# Altium PCB captivate_pgmr.PcbDoc (part 1 of 2)
Units mil, origin at the board's own origin, x right, y up, seen from the top; angles counter-clockwise.
Board outline 2200 x 2200 mil, 4 copper layers (Top Layer, Signal Layer 1, Signal Layer 2, Bottom Layer), stack 61.6 mil thick; 159 components, 109 nets, 528 pads, 147 vias.
Unrouted connection lines stored in the file: 5.
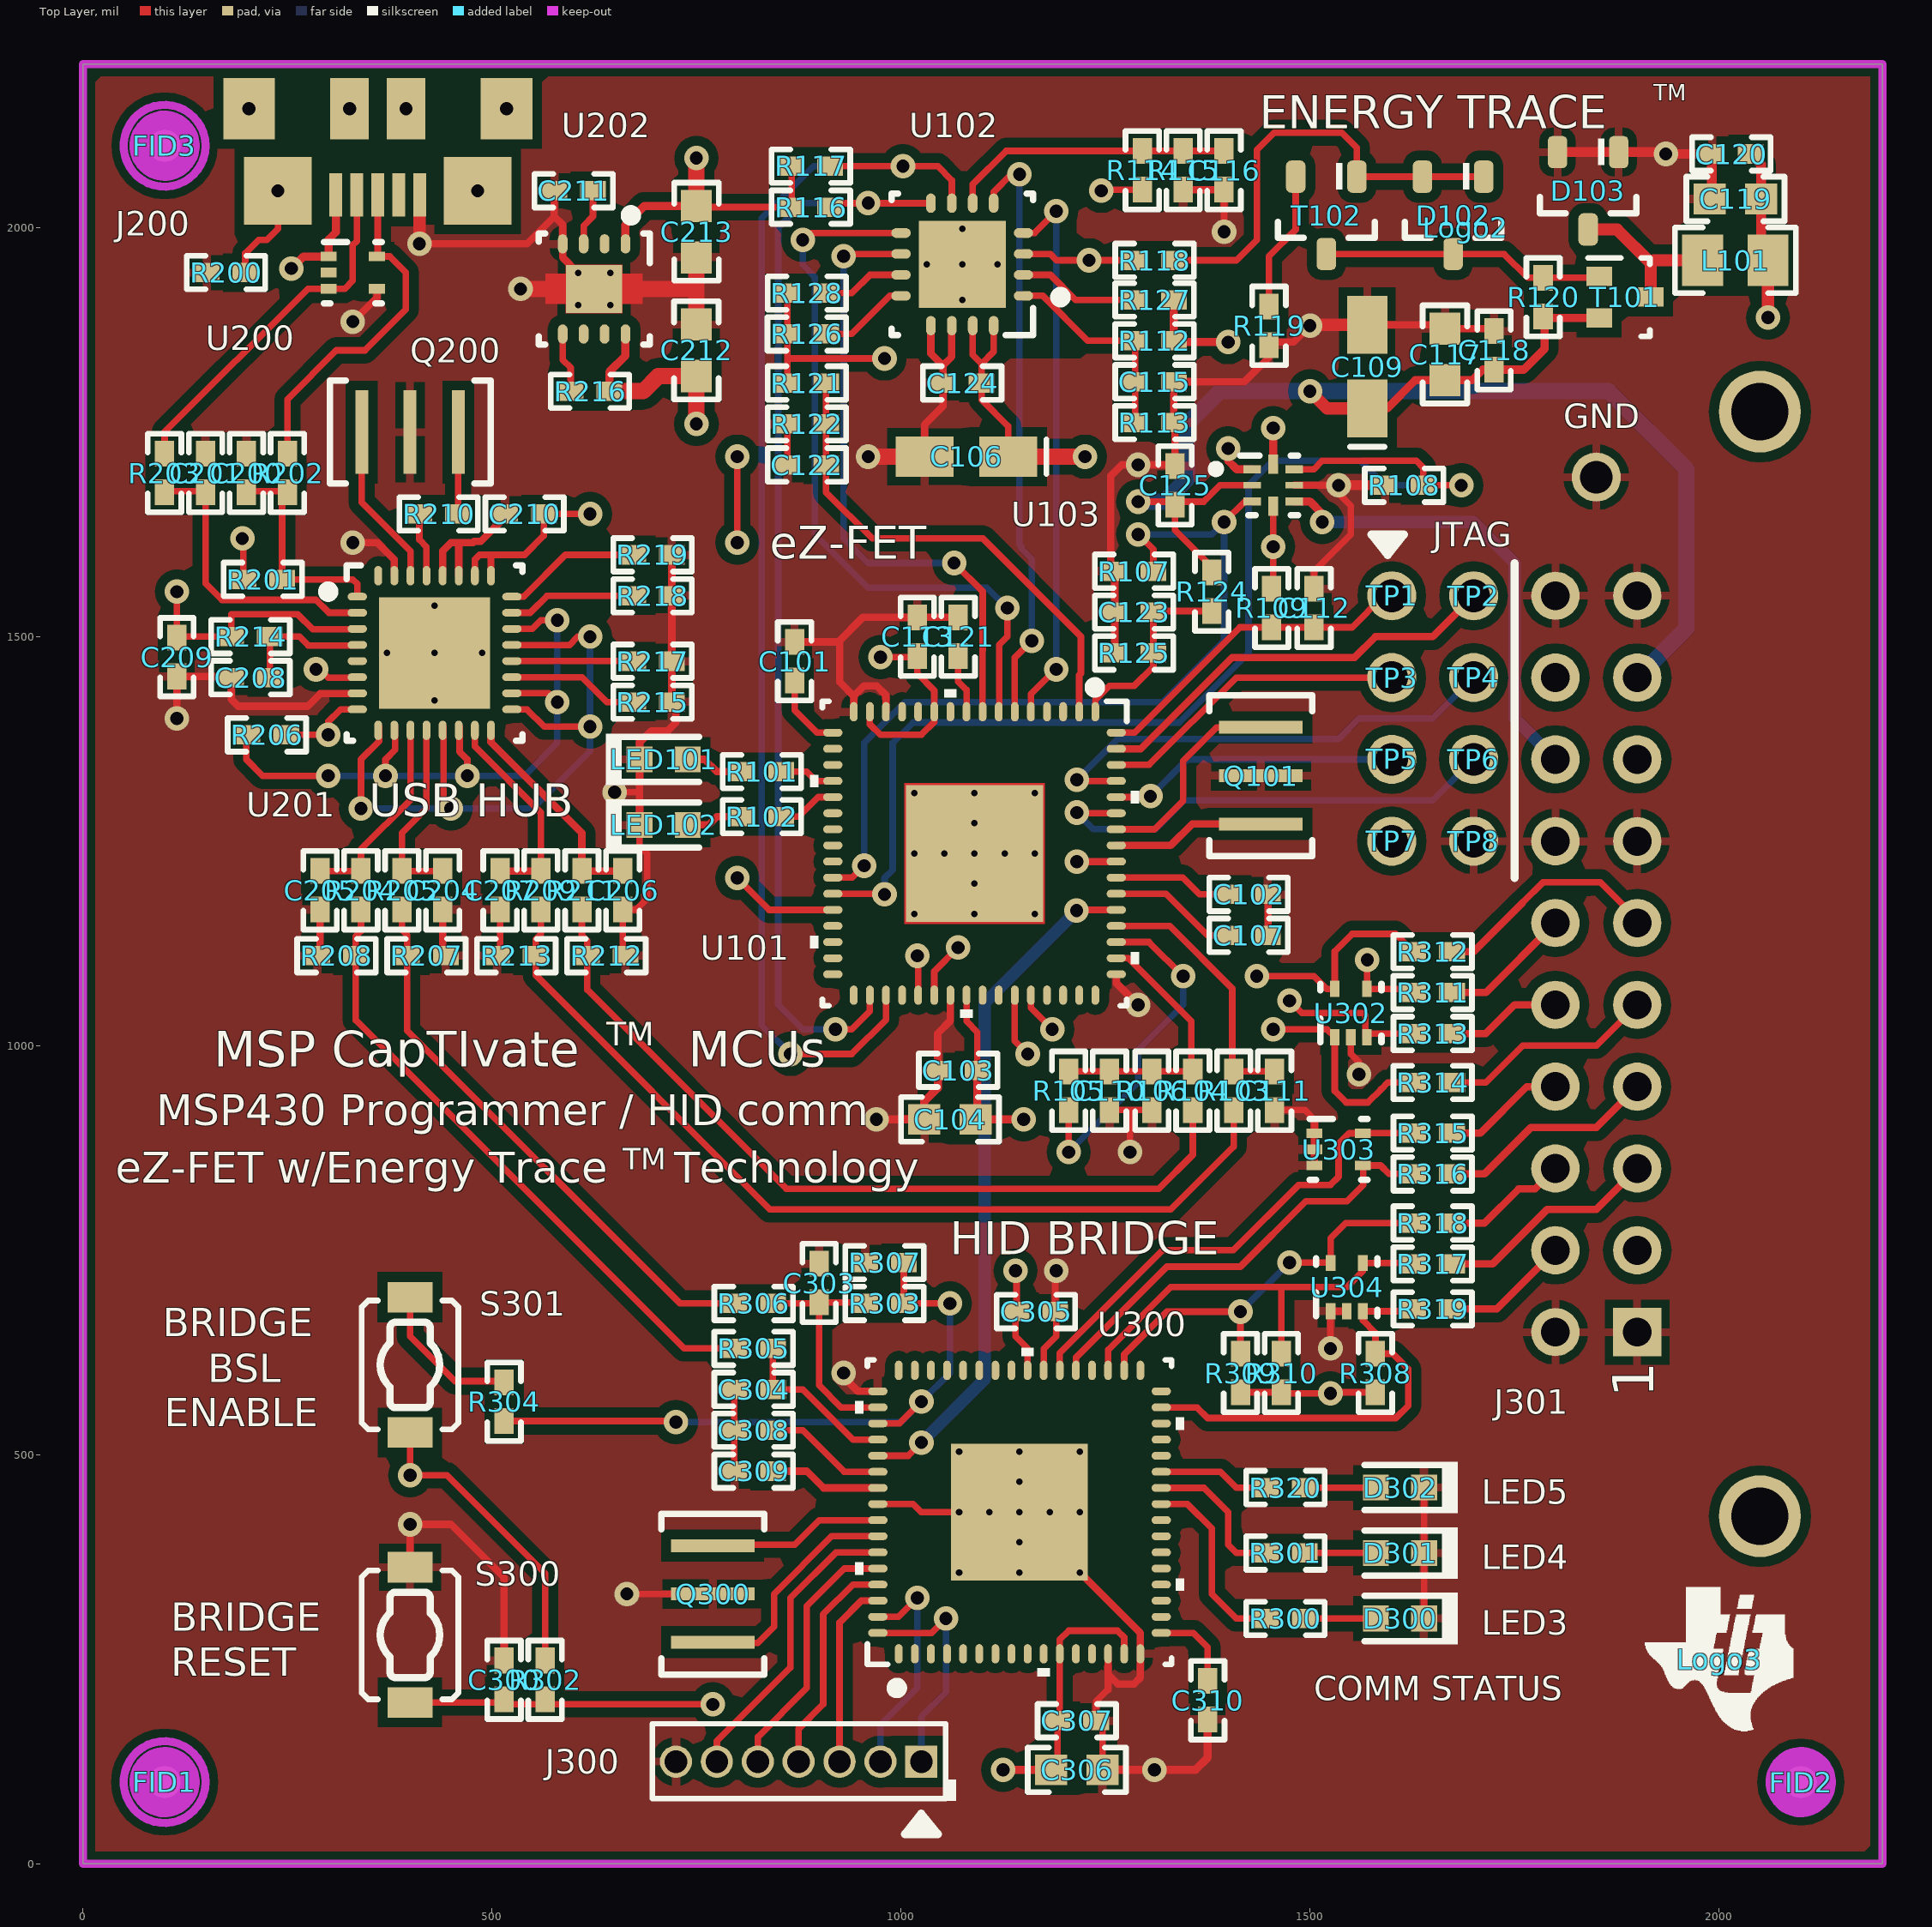
[diagram p0: Top Layer view]
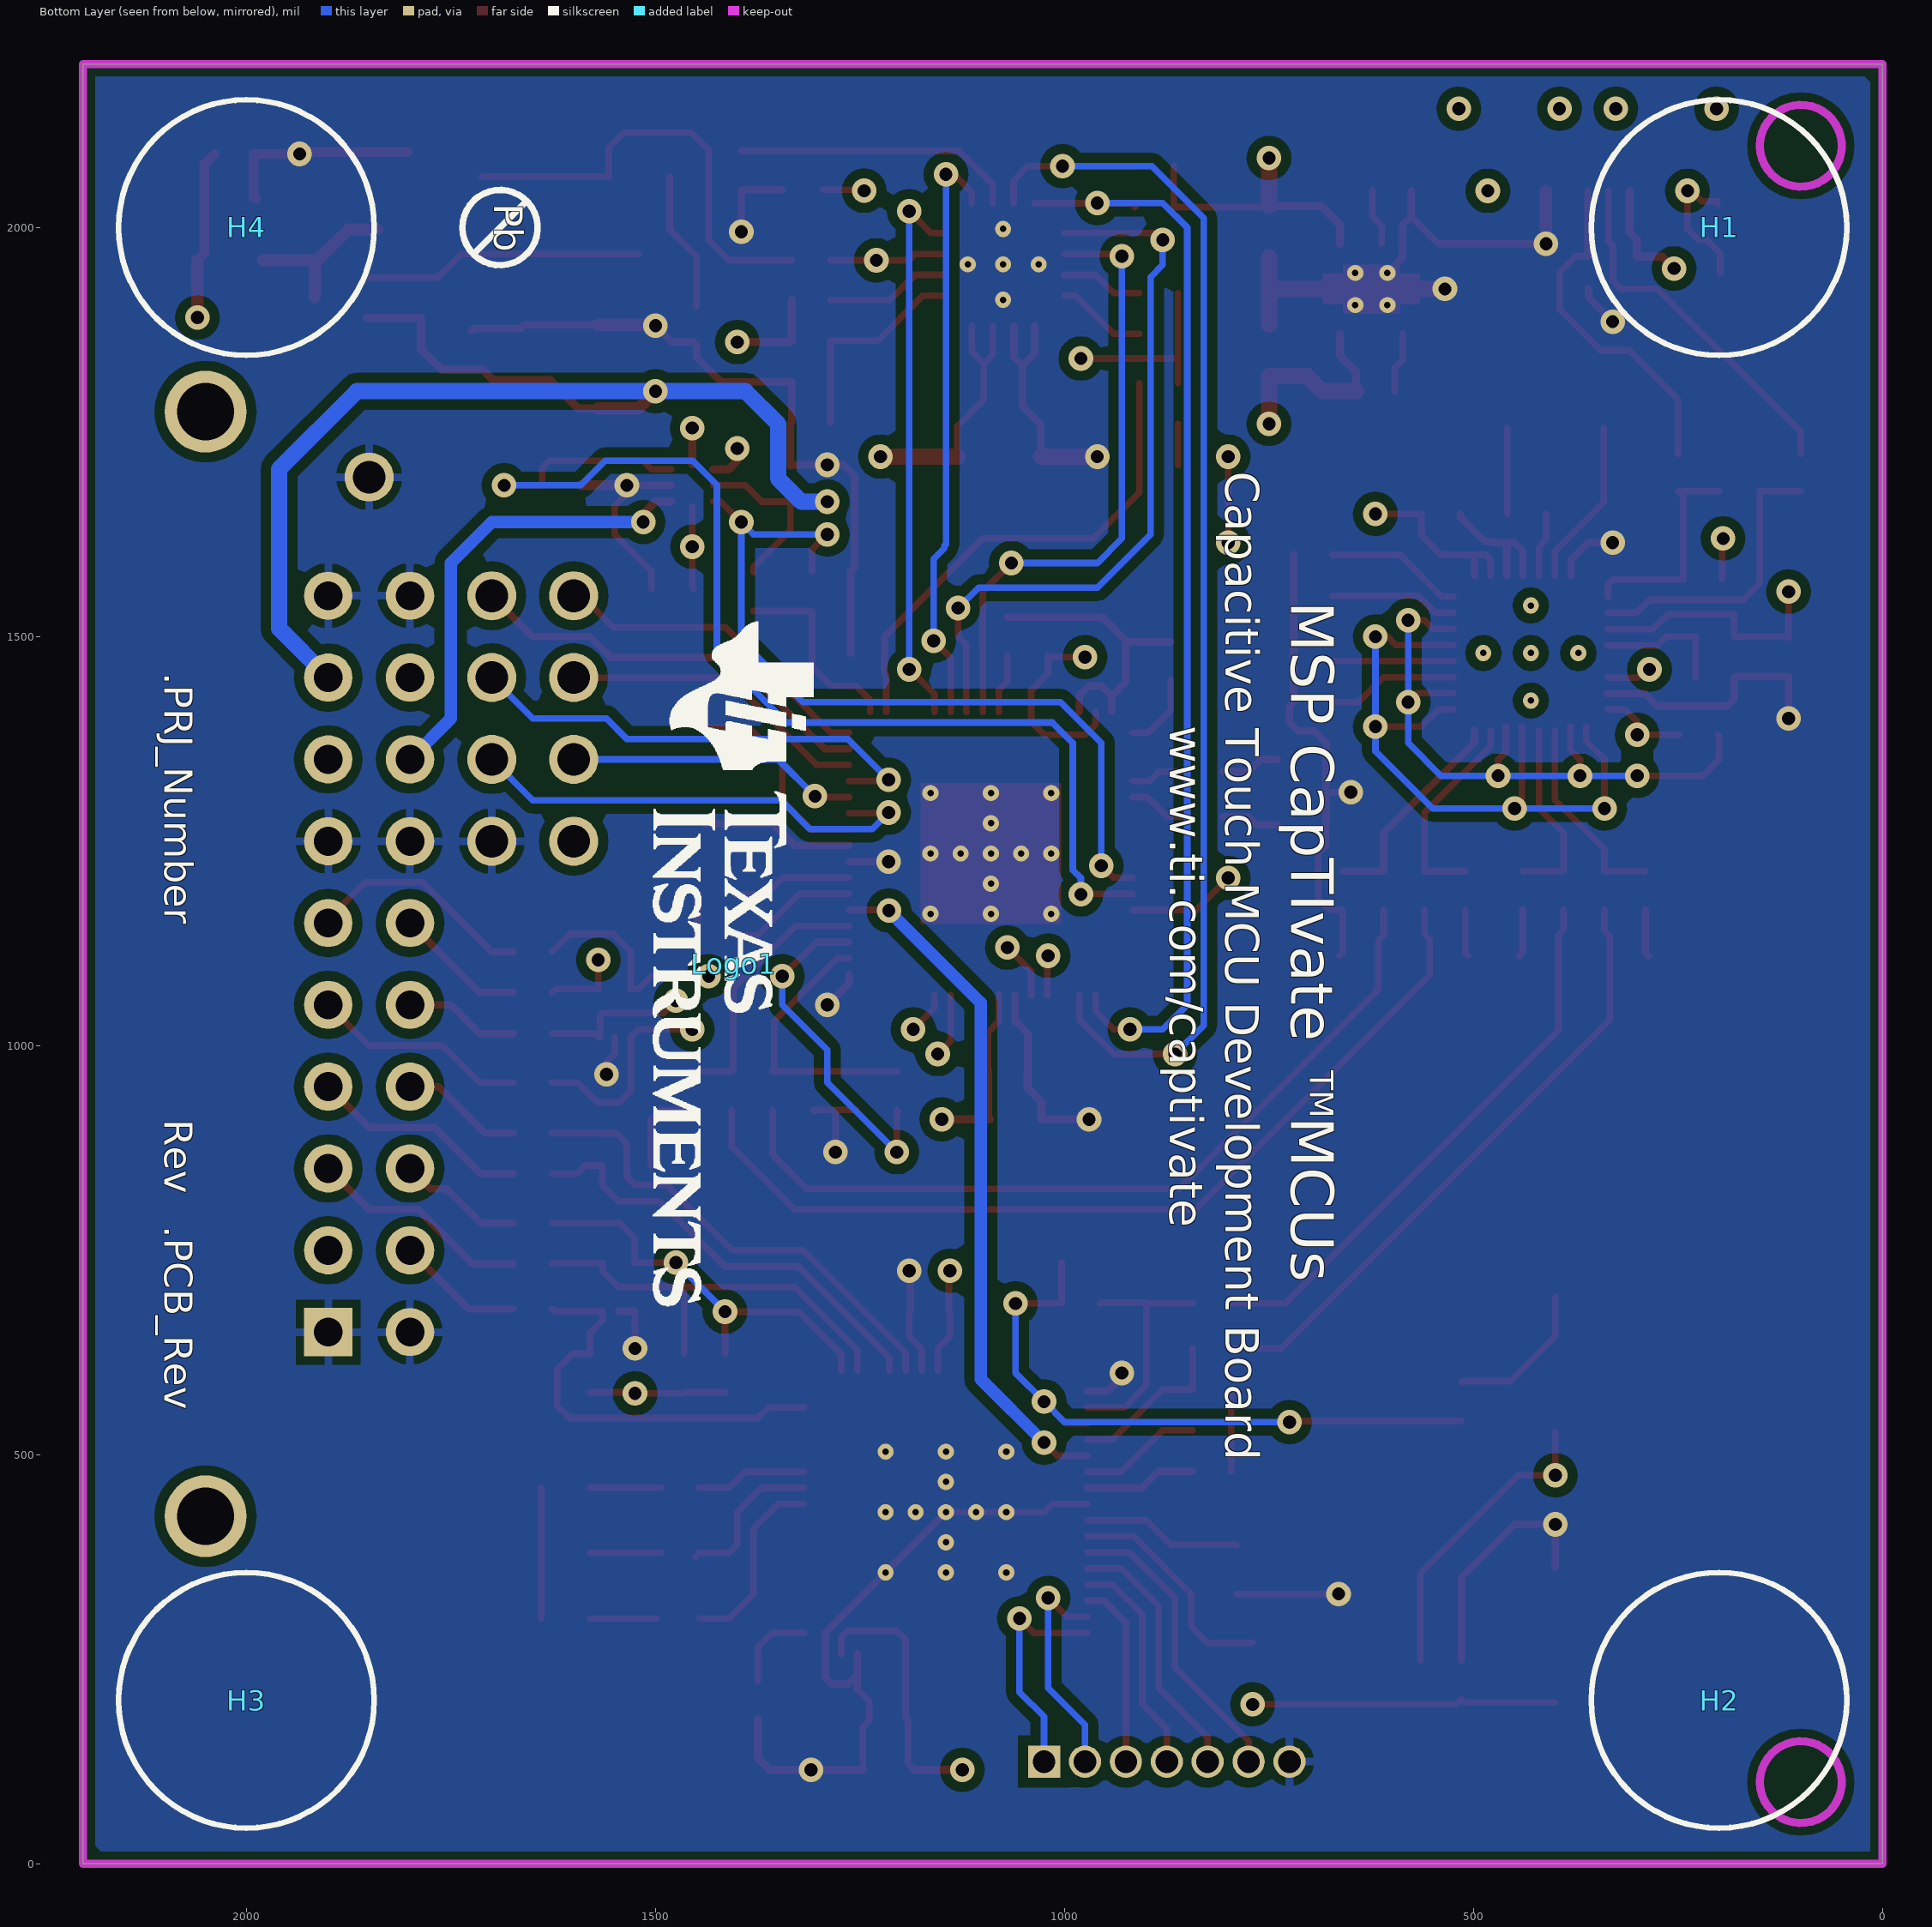
[diagram p1: Bottom Layer view, seen from below]
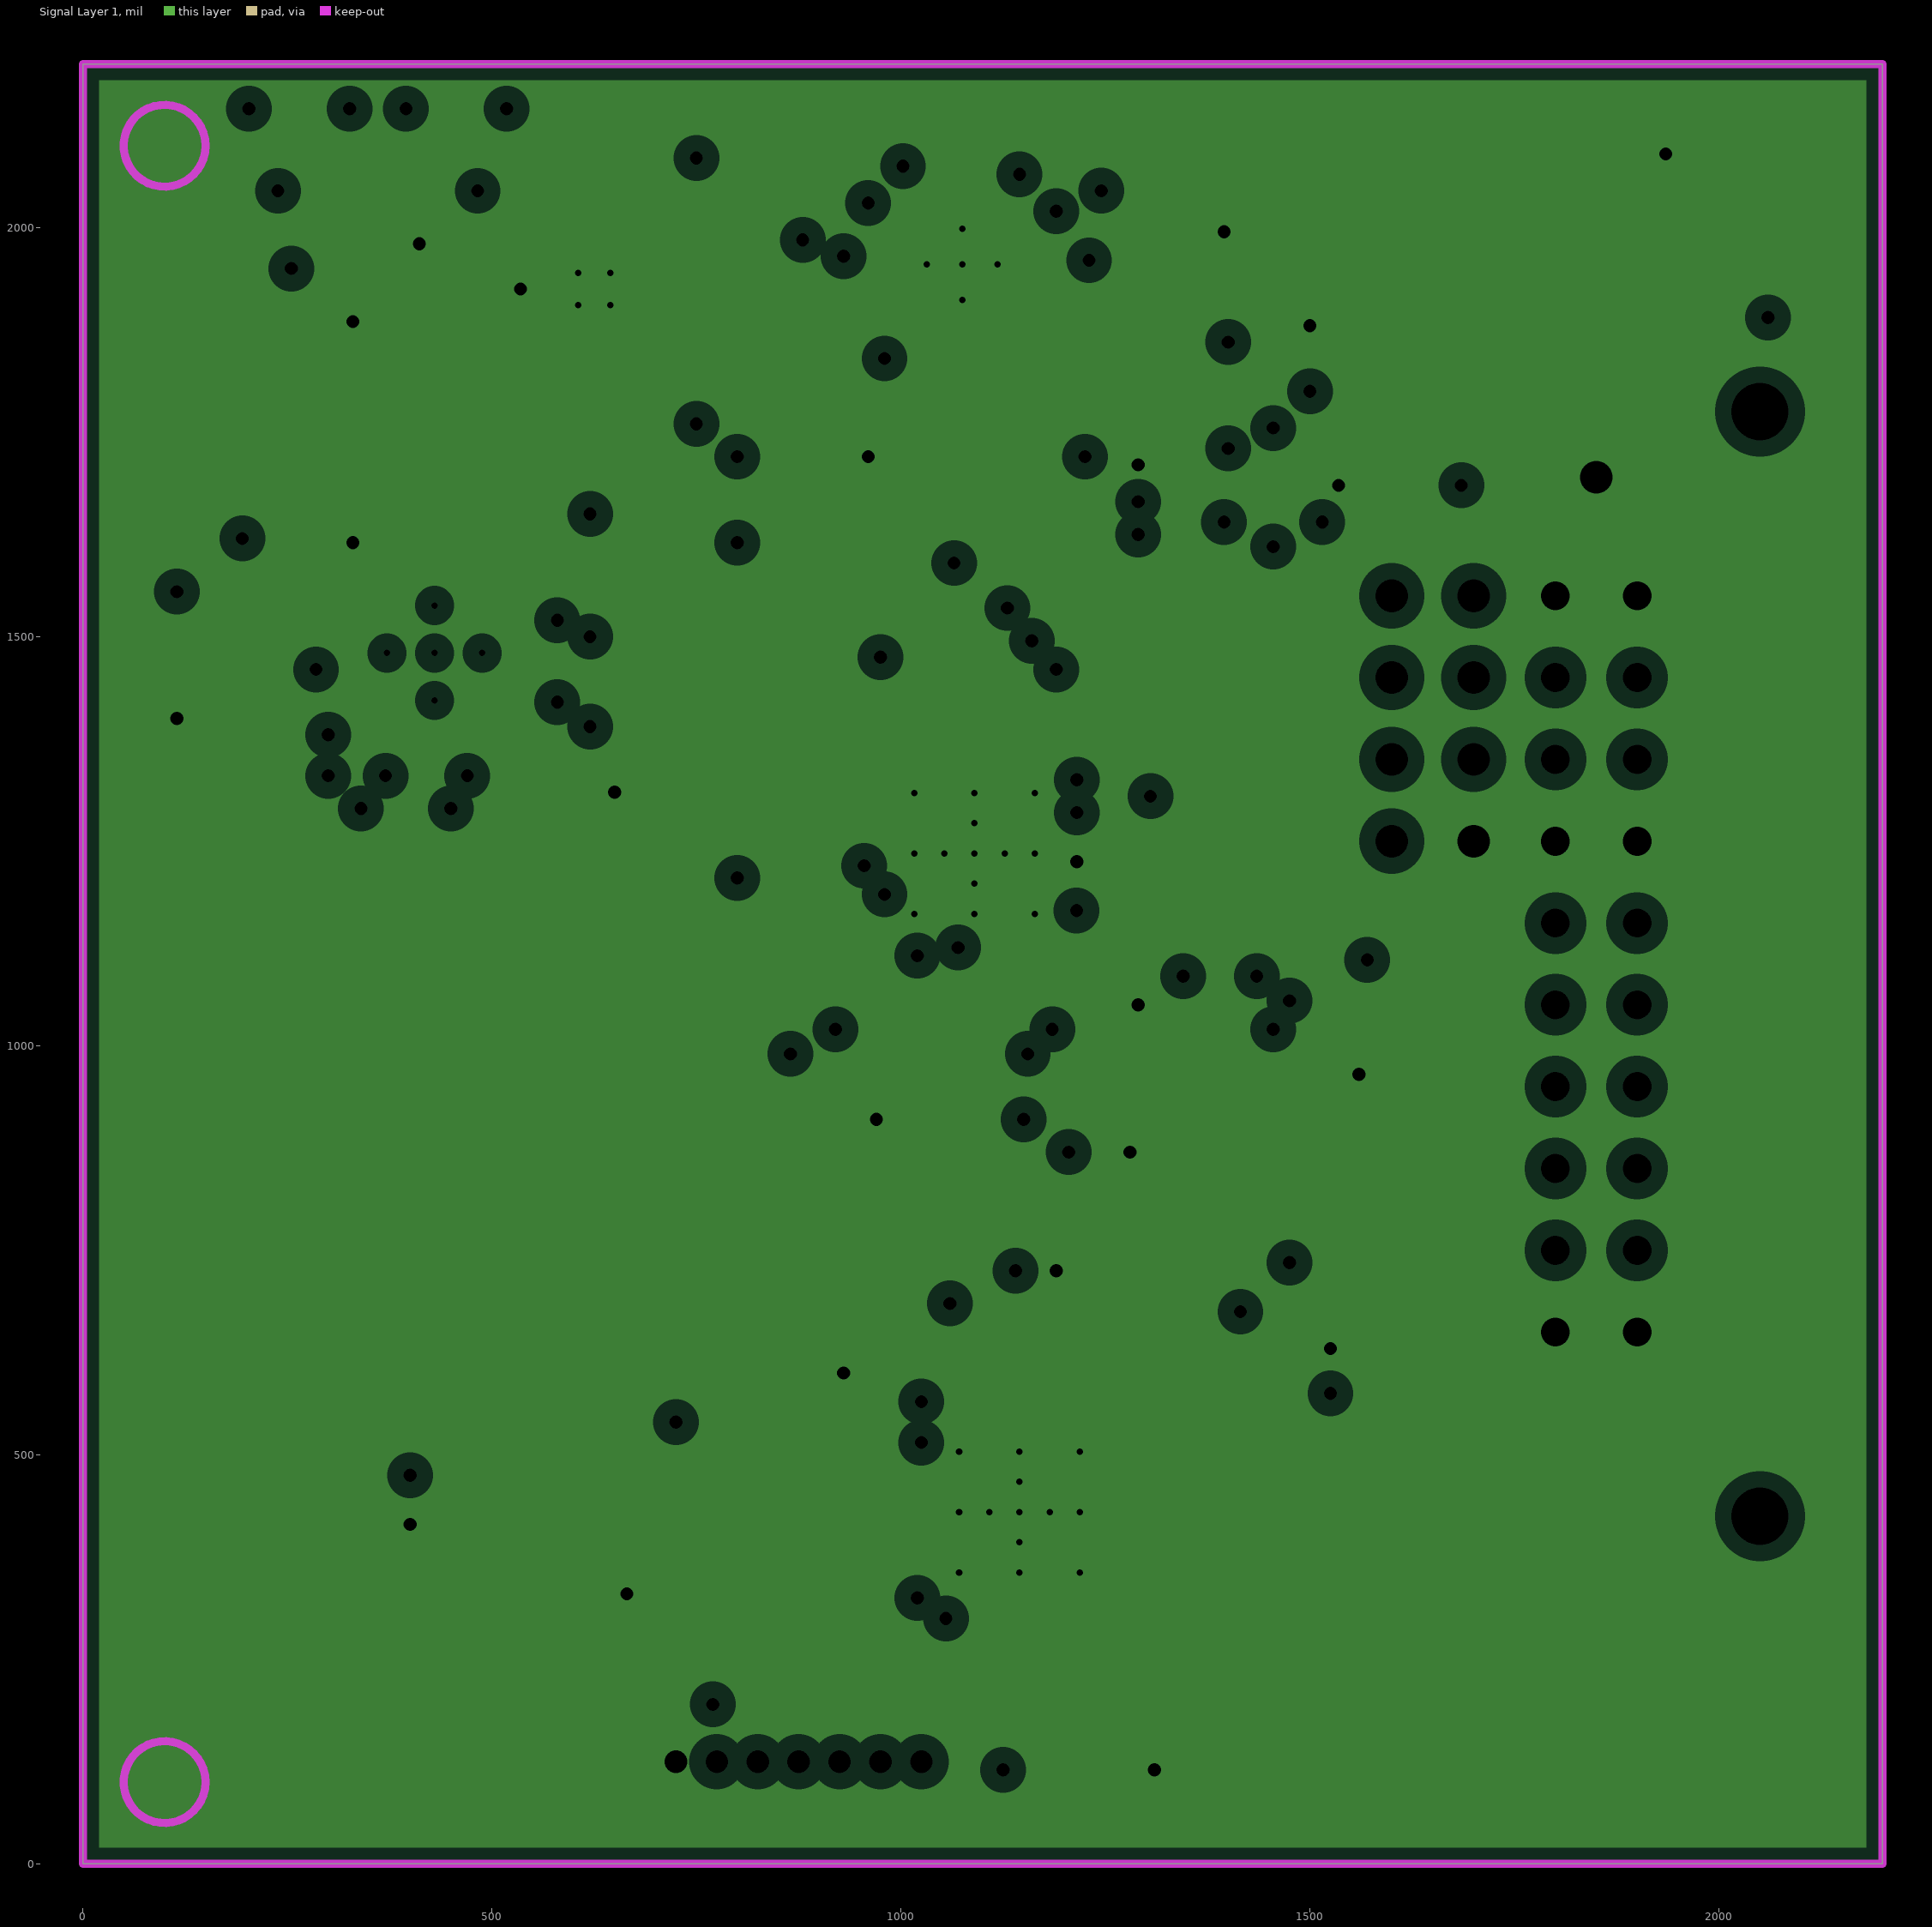
[diagram p2: Signal Layer 1, clearances drawn from the general rule]
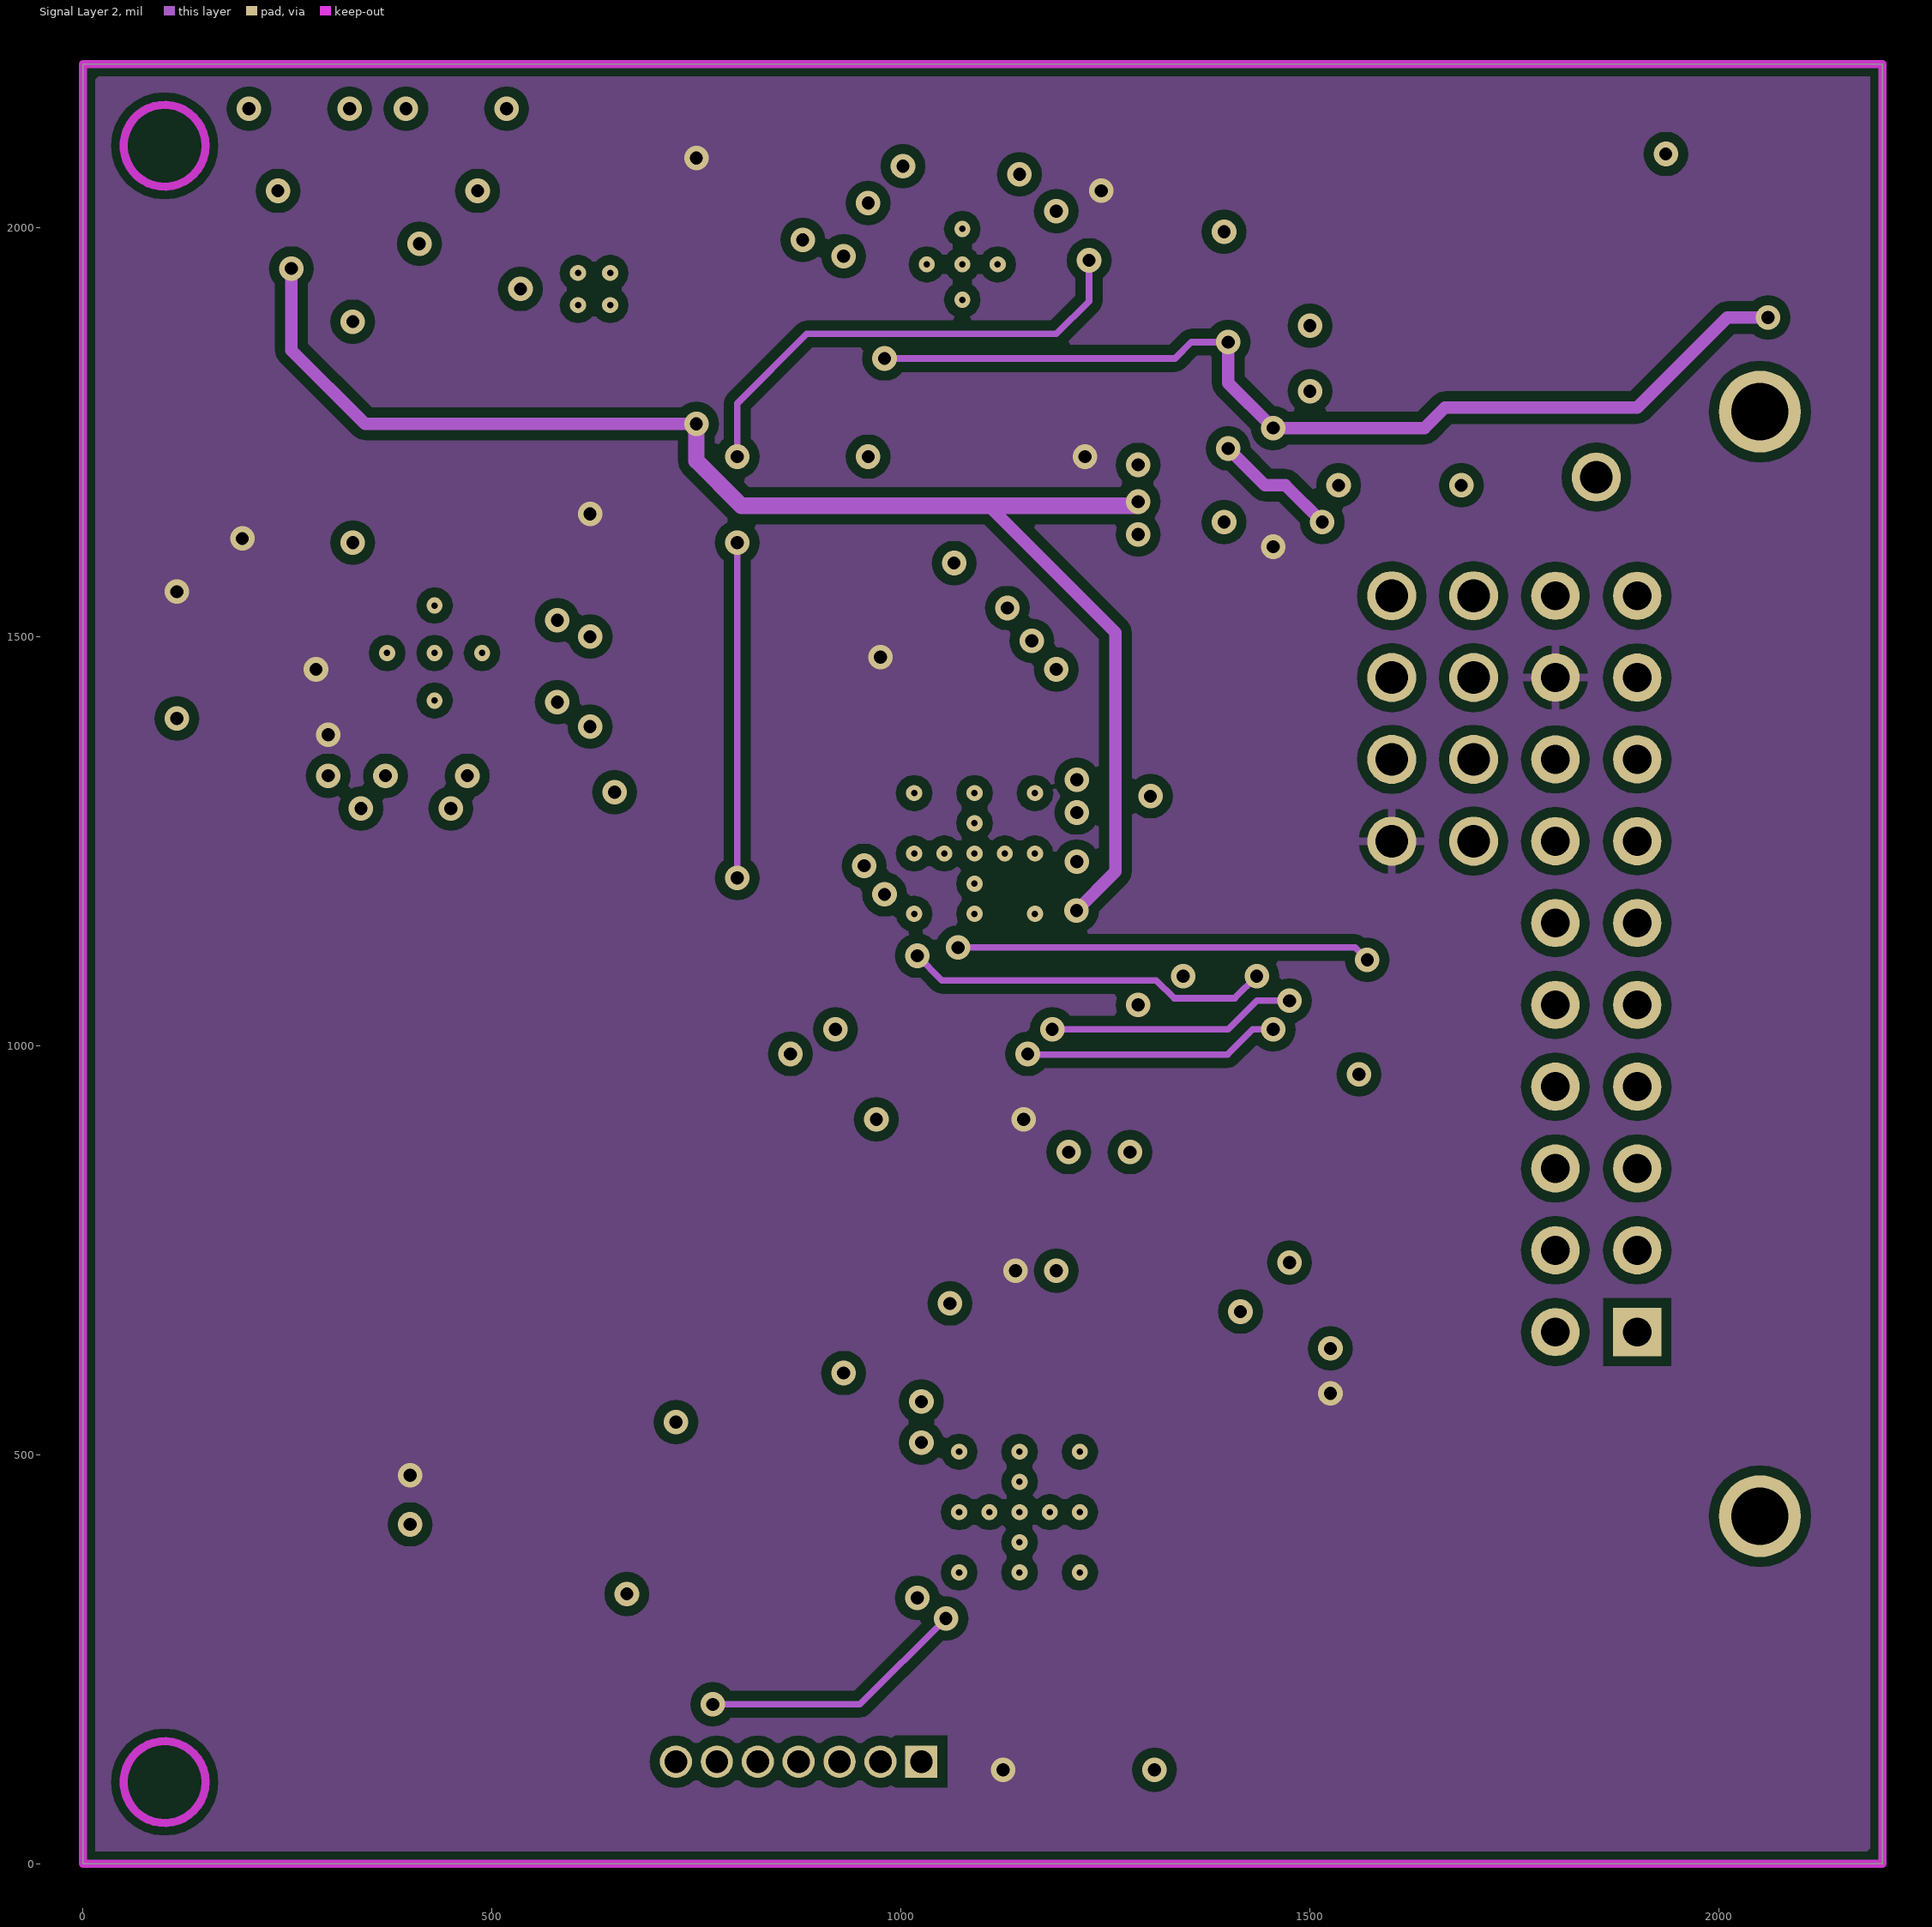
[diagram p3: Signal Layer 2]

## Layer stack, top to bottom
Top Solder: solder mask 0.4, Solder Resist, Dk 3.5
Top Layer: signal copper 1.4
Dielectric1: core 8, Dk 4.2
Signal Layer 1: plane copper 1.4, net GND
Dielectric 2: prepreg 40, FR-4, Dk 4.2
Signal Layer 2: signal copper 1.4
Dielectric 3: core 8, Dk 4.2
Bottom Layer: signal copper 1.4
Bottom Solder: solder mask 0.4, Solder Resist, Dk 3.5

## Board outline
0,0 0,2200 2200,2200 2200,0

## Design rules (kind name [scope] priority, off if disabled: settings)
AcuteAngle [All] p1: minimum=4.50000000000000E+0001 checktracksonly=FALSE
AssemblyTestPointUsage [All] p1: valid=2
Clearance Clearance_Keepouts [((IsTrack Or IsArc) And Not InPoly) And IsFree and IsKeepOut vs ((IsTrack Or IsArc) And Not InPoly) And IsFree and IsKeepOut] p1: gap=0
Clearance Clearance_BoardEdge_MountingHoles [OnCopper and InComponentClass('Mounting Holes') vs IsKeepOut] p2: gap=40
Clearance Clearance_BoardEdge_USB_connector [(InPadClass('All Pads') AND InComponent('J200')) vs IsKeepOut] p3: gap=10
Clearance Clearance_BoardEdge_USB_connector_vias [(IsVia AND InNet('USB_SHIELD')) vs IsKeepOut] p4: gap=20
Clearance Clearance_BoardEdge_Poly [OnCopper and InPoly vs IsKeepOut] p5: gap=10
Clearance Clearance_BoardEdge [OnCopper and Not InComponentClass('Logo') and not InComponentClass('FiducialMark') and not InRegion(1000,500,4000,800) and Not IsKeepout vs IsKeepOut] p6: gap=60
Clearance Clearance_Poly [InPolygon] p7: gap=12
Clearance [All] p8: gap=7.87
ComponentClearance ComponentClearance_MountingHoles_FiducialMarks [InComponentClass('Mounting Holes') vs InComponentClass('FiducialMark')] p1: gap=50 collisioncheckmode=3 verticalgap=10 showdistances=FALSE
ComponentClearance ComponentClearance_Shunt [InComponentClass('Header') vs InComponentClass('Shunt')] p2: gap=0 collisioncheckmode=3 verticalgap=0 showdistances=FALSE
ComponentClearance ComponentClearance_Logo [InComponentClass('Logo')] p3: gap=0 collisioncheckmode=3 verticalgap=10 showdistances=FALSE
ComponentClearance ComponentClearance_ScrewToNut [(HasFootprint('NY PMS 440 0025 PH')) vs (HasFootprint('Keystone_1902C'))] p4: gap=5 collisioncheckmode=3 verticalgap=10 showdistances=FALSE
ComponentClearance ComponentClearance_MountingHoles [InComponentClass('Mounting Holes')] p5: gap=250 collisioncheckmode=3 verticalgap=100000 showdistances=FALSE
ComponentClearance ComponentClearance_SmallPassives [HasFootprint('0201*') or HasFootprint('0402*') or HasFootprint('0508') or HasFootprint('0603*') or HasFootprint('0612') or HasFootprint('0805*') or HasFootprint('0815*') or HasFootprint('0830*') or HasFootprint('1206*') or HasFootprint('1210*') or HasFootprint('1808*') or HasFootprint('1812*') or HasFootprint('1825*') or HasFootprint('2010*') or HasFootprint('2220*') or HasFootprint('2225*') or HasFootprint('2512*') or HasFootprint('2728*') or HasFootprint('3518*') vs HasFootprint('0201*') or HasFootprint('0402*') or HasFootprint('0508') or HasFootprint('0603*') or HasFootprint('0612') or HasFootprint('0805*') or HasFootprint('0815*') or HasFootprint('0830*') or HasFootprint('1206*') or HasFootprint('1210*') or HasFootprint('1808*') or HasFootprint('1812*') or HasFootprint('1825*') or HasFootprint('2010*') or HasFootprint('2220*') or HasFootprint('2225*') or HasFootprint('2512*') or HasFootprint('2728*') or HasFootprint('3518*')] p6: gap=20 collisioncheckmode=3 verticalgap=10 showdistances=FALSE
ComponentClearance ComponentClearance_TEST_POINT [InComponent('TP1') OR  InComponent('TP2') OR InComponent('TP3') OR  InComponent('TP4') OR InComponent('TP5') OR  InComponent('TP6') OR InComponent('TP7') OR  InComponent('TP8') vs IsThruComponent] p7: gap=10 collisioncheckmode=3 verticalgap=10 showdistances=FALSE
ComponentClearance ComponentClearance_THtoSMT_J100 [InComponent('J100') vs IsSMTComponent] p8: gap=20 collisioncheckmode=3 verticalgap=30 showdistances=FALSE
ComponentClearance ComponentClearance_THtoSMT [IsThruComponent vs IsSMTComponent] p9: gap=40 collisioncheckmode=3 verticalgap=30 showdistances=FALSE
ComponentClearance ComponentClearance_THtoTH [IsThruComponent vs IsThruComponent] p10: gap=75 collisioncheckmode=3 verticalgap=30 showdistances=FALSE
ComponentClearance [All] p11: gap=40 collisioncheckmode=3 verticalgap=10 showdistances=FALSE
DiffPairsRouting [All] p1: maxlimit=100 minlimit=10 mostfreqgap=10 toplayer_minwidth=15 toplayer_maxwidth=15 toplayer_prefwidth=15 midlayer1_minwidth=15 midlayer1_maxwidth=15 midlayer1_prefwidth=15 bottomlayer_minwidth=15 bottomlayer_maxwidth=15 bottomlayer_prefwidth=15 maxuncoupledlength=1000
FabricationTestPointUsage TestPointUsage [All] p1: valid=2 allowmultiple=FALSE
FabricationTestpoint Testpoint [All] p1: side=3 testpointundercomponent=TRUE minsize=40 maxsize=100 preferedsize=60 minholesize=0 maxholesize=40 preferedholesize=32 testpointgrid=1 allowsidetop=TRUE allowsidebottom=TRUE usegrid=TRUE gridtolerance=0.01
FanoutControl Fanout_LCC [IsLCC] p1: bgadir=Out bgaviamode=Centered fanoutstyle=Auto fanoutdirection=Alternating viagrid=1 // Fanout_LCC (Default Rule)
FanoutControl Fanout_BGA [IsBGA] p2: bgadir=Out bgaviamode=Centered fanoutstyle=Auto fanoutdirection=Alternating viagrid=1 // Fanout_BGA (Default Rule)
FanoutControl Fanout_Default [All] p4: bgadir=Out bgaviamode=Centered fanoutstyle=Auto fanoutdirection=Alternating viagrid=1 // Fanout_Default (Default Rule)
FanoutControl Fanout_Small [(CompPinCount < 5)] p5: bgadir=Out bgaviamode=Centered fanoutstyle=Auto fanoutdirection=OutThenIn viagrid=1 // Fanout_Small (Default Rule)
HoleSize [All] p1: absolutevalues=TRUE maxlimit=251 minlimit=7.87 maxpercent=80.000 minpercent=20.000
MinimumAnnularRing MinimumAnnularRing_ThermalPadVias [IsVia and InAnyComponent] p1: minimumring=5.91
MinimumAnnularRing MinimumAnnularRing_50mil_connectors [IsPad AND (InComponent('J100') OR InComponent('J300'))] p2: minimumring=5.9
MinimumAnnularRing [All] p3: minimumring=7
MinimumSolderMaskSliver MinimumSolderMaskSliver_Logo [InComponentClass('Logo') vs InComponentClass('Logo')] p1: minsoldermaskwidth=0.7
MinimumSolderMaskSliver [All] p2: minsoldermaskwidth=3.9
PlaneClearance [All] p1: clearance=20
PlaneConnect [All] p1: planeconnectstyle=Direct reliefexpansion=10 reliefentries=4 reliefconductorwidth=10 reliefairgap=10
PolygonConnect PolygonConnect_vias_GND [InNet('GND') AND ISVia] p1: connectstyle=Direct reliefconductorwidth=10 reliefentries=4 polygonreliefangle="90 Angle" airgapwidth=10
PolygonConnect PolygonConnect_vias_VCC_LDO [InNet('VCC_LDO') AND ISVia] p2: connectstyle=Direct reliefconductorwidth=10 reliefentries=4 polygonreliefangle="90 Angle" airgapwidth=10
PolygonConnect [All] p3: connectstyle=Relief reliefconductorwidth=10 reliefentries=4 polygonreliefangle="90 Angle" airgapwidth=10
RoutingVias ThermalPadVias [IsVia and InAnyComponent] p1: holewidth=7.87 width=19.68 viastyle="Through Hole" minholewidth=7.87 minwidth=19.68 maxholewidth=12.99 maxwidth=23.62
RoutingVias [All] p2: holewidth=16 width=34 viastyle="Through Hole" minholewidth=7.87 minwidth=26 maxholewidth=40 maxwidth=65
SilkToBoardRegionClearance [Not ((IsComment or IsDesignator) And (Hide <> 'False')) and not InRegion(1000,500,4000,800)] p1:
SilkToSilkClearance SilkToSilkClearance_Pb-FreeLogo [(HasFootprint('Pb-Free_Overlay_Medium') OR HasFootprint('Pb-Free_Overlay_Small')) vs (HasFootprint('Pb-Free_Overlay_Medium') OR HasFootprint('Pb-Free_Overlay_Small'))] p1: silktosilkclearance=0
SilkToSilkClearance [All] p2: silktosilkclearance=5
SilkToSolderMaskClearance "Silk to Solder Mask Opening" [All] p1: minsilkscreentomaskgap=1 clearancetoexposedcopper=FALSE
SolderMaskExpansion [All] p1: expansion=1.97
UnpouredPolygon [All] p1: allowunpoured=FALSE
Width [All] p1: maxlimit=100 minlimit=6 preferedwidth=10 checkconnectedcopper=TRUE
13 further rules are at their usual default settings.

## Classes and differential pairs
component class FiducialMark: FID1 FID2 FID3
component class Logo: Logo1 Logo3
component class U_hardware: FID1 FID2 FID3 H1 H2 H3 H4 Logo1 Logo2 Logo3 ZZ2 ZZ3 ZZ4
component class AssemblyNote: ZZ2 ZZ3 ZZ4
component class Header: J300
component class U_bridge: C300 C303 C304 C305 C306 C307 C308 C309 C310 D300 D301 D302 GND J300 J301 Q300 R300 R301 R302 R303 R304 R305 R306 R307 R308 R309 R310 R311 R312 R313 R314 R315 R316 R317 R318 R319 R320 S300 S301 U300 U302 U303 U304
component class U_ezfet: C101 C102 C103 C104 C106 C107 C109 C110 C111 C112 C113 C115 C116 C117 C118 C119 C120 C121 C122 C123 C124 C125 D102 D103 L101 LED101 LED102 Q101 R101 R102 R103 R104 R105 R106 R107 R108 R109 R112 R113 R114 R115 R116 R117 R118 R119 R120 R121 R122 R124 R125 R126 R127 R128 T101 T102 TP1 TP2 TP3 TP4 TP5 TP6 TP7 TP8 U100 U101 U102 U103
component class U_usbhub: C200 C201 C204 C205 C206 C207 C208 C209 C210 C211 C212 C213 J200 Q200 R200 R201 R202 R203 R204 R205 R206 R207 R208 R209 R210 R211 R212 R213 R214 R215 R216 R217 R218 R219 U200 U201 U202

## Components (designator, comment, footprint, x,y, rotation, side; value= is the part's Value field where it differs from the comment)
C101 "GRM155R61A474KE15D" 0402 870,1470 r90 top
C102 "GRM155R61A224KE19D" 0402 1425,1185 r0 top
C103 "C1005X5R1A104K" 0402 1070,970 r180 top
C104 "CGB3B1X5R1A475K055AC" 0603 1060,910 r180 top
C106 "293D475X9010A2TE3" 3216-18 1080,1720 r180 top
C107 "GRM155R61A224KE19D" 0402 1425,1135 r0 top
C109 "293D475X9010A2TE3" 3216-18 1570,1830 r90 top
C110 "500R07S100JV4T" 0402 1255,945 r270 top
C111 "500R07S100JV4T" 0402 1456.79,945 r270 top
C112 "C1005X7R1H102K" 0402 1505,1535 r90 top
C113 "C1005X5R1A104K" 0402 1020,1500 r90 top
C115 "GRM1555C1H330JA01D" 0402 1310,1811.65 r0 top
C116 "GRM1555C1H330JA01D" 0402 1395,2070 r270 top
C117 "0603ZD475KAT2A" 0603 1665,1845 r90 top
C118 "C1005X5R1A104K" 0402 1725,1850 r90 top
C119 "0603ZD475KAT2A" 0603 2020,2035 r180 top
C120 "C1005X5R1A104K" 0402 2015,2090 r180 top
C121 "C1005X5R1A104K" 0402 1070,1500 r90 top
C122 "GRM1555C1H330JA01D" 0402 885,1710 r180 top
C123 "GRM1555C1H330JA01D" 0402 1285,1530 r180 top
C124 "C1005X5R1A104K" 0402 1075,1810 r180 top
C125 "C1005X5R1A104K" 0402 1335,1685 r90 top
C200 "GRM1555C1H220JA01D" 0402 200,1700 r90 top
C201 "GRM1555C1H220JA01D" 0402 150,1700 r90 top
C204 "GRM1555C1H100JA01D" 0402 440,1190 r270 top
C205 "GRM1555C1H100JA01D" 0402 290,1190 r270 top
C206 "GRM1555C1H100JA01D" 0402 660,1190 r270 top
C207 "GRM1555C1H100JA01D" 0402 510,1190 r270 top
C208 "GRM155R61C104KA88D" 0402 205,1450 r180 top
C209 "GRM155R61C104KA88D" 0402 115,1475 r270 top
C210 "GRM155R61C104KA88D" 0402 540,1650 r180 top
C211 "GRM155R61C103KA01D" 0402 600,2045 r180 top
C212 "C0603C105K8PACTU" 0603 750,1850 r90 top
C213 "C0603C225K8PACTU" 0603 750,1995 r270 top
C300 "C1005X7R1H102K" 0402 515,225 r90 top
C303 "GRM1555C1H100JA01D" 0402 900,710 r90 top
C304 "GRM1555C1H100JA01D" 0402 820,580 r180 top
C305 "GRM155R61C104KA88D" 0402 1165,675 r0 top
C306 "CGB3B1X5R1A475K055AC" 0603 1215,115 r0 top
C307 "GRM155R61C104KA88D" 0402 1215,175 r0 top
C308 "GRM155R61A224KE19D" 0402 820,530 r180 top
C309 "GRM155R61A224KE19D" 0402 820,480 r180 top
C310 "GRM155R61A474KE15D" 0402 1375,200 r270 top
D102 "BAS40-05-7-F" SOT-23 1675,2015 r270 top
D103 "BAS40-05-7-F" SOT-23 1840,2045 r270 top
D300 "LTST-C190CKT" LED_LTST-C190_Red 1610,300 r0 top
D301 "LTST-C190GKT" LED_LTST-C190 1610,380 r0 top
D302 "LTST-C190GKT" LED_LTST-C190 1610,460 r0 top
FID1 "Fiducial" Fiducial10-20 100,100 r90 top
FID2 "Fiducial" Fiducial10-20 2100,100 r90 top
FID3 "Fiducial" Fiducial10-20 100,2100 r90 top
GND "TESTPOINT" TP_VIA_060RND040 1850,1695 r0 top
H1 "SJ61A1" Bumpon_SJ61A1 200,2000 r180 bottom
H2 "SJ61A1" Bumpon_SJ61A1 200,200 r180 bottom
H3 "SJ61A1" Bumpon_SJ61A1 2000,200 r180 bottom
H4 "SJ61A1" Bumpon_SJ61A1 2000,2000 r180 bottom
J200 "ZX62R-B-5P" CONN_USB_micro_ZX62R-B-5PA 360.55,2040 r180 top
J300 "GRPB071VWVN-RC" Sullins_GRPB071VWVN-RC 900,125 r180 top locked
J301 "Header 10X2RA" HDR2X10RA 1900,650 r90 top locked
L101 "CIG21L2R2MNE" 0805_HV 2020,1960 r0 top
LED101 "LTST-C190CKT" LED_LTST-C190_Red 710,1350 r180 top
LED102 "LTST-C190GKT" LED_LTST-C190 710,1270 r180 top
Logo1 "Texas Instruments" TI_Stacked_Overlay_Small 1405,1100 r270 bottom
Logo2 "Pb-Free Symbol" Pb-Free_Overlay_Small 1690,2000 r270 top
Logo3 "Texas Instruments" TI_Symbol_Overlay_Small 2000,250 r0 top
Q101 "MURATA-FILTER_CSTCR4M00G15" "CSTCR CERAMIC RESONATOR - MURATA" 1440,1330 r90 top
Q200 "" "CSTCR CERAMIC RESONATOR - MURATA" 400,1750 r0 top
Q300 "RATA-FILTER_CSTCR4M00G15" "CSTCR CERAMIC RESONATOR - MURATA" 770,330 r270 top
R101 "CRCW0402470RJNED" 0402 830,1335 r0 top
R102 "CRCW0402390RJNED" 0402 830,1280 r0 top
R103 "CRCW040227R0JNED" 0402 1406.79,945 r90 top
R104 "CRCW040227R0JNED" 0402 1356.79,945 r90 top
R105 "CRCW04021K40FKED" 0402 1205,945 r90 top
R106 "CRCW04021M00JNED" 0402 1306.79,945 r270 top
R107 "CRCW040247K0JNED" 0402 1285,1580 r0 top
R108 "CRCW040247K0JNED" 0402 1615,1685 r0 top
R109 "CRCW040247K0JNED" 0402 1453.21,1535 r90 top
R112 "CRCW0402220KJNED" 0402 1310,1861.65 r0 top
R113 "CRCW0402220KJNED" 0402 1310,1761.65 r180 top
R114 "CRCW0402220KJNED" 0402 1295,2070 r270 top
R115 "CRCW0402220KJNED" 0402 1345,2070 r90 top
R116 "CRCW04024K70JNED" 0402 890,2025 r180 top
R117 "CRCW04024K70JNED" 0402 890,2075 r180 top
R118 "CRCW0402820RJNED" 0402 1310,1960 r180 top
R119 "CRCW04020000Z0ED" 0402 1450,1880 r270 top
R120 "CRCW0402470RJNED" 0402 1785,1915 r90 top
R121 "CRCW0402220KJNED" 0402 885,1810 r180 top
R122 "CRCW0402220KJNED" 0402 885,1760 r0 top
R124 "CRCW0402240KJNED" 0402 1380,1555 r90 top
R125 "CRCW0402150KFKED" 0402 1285,1480 r0 top
R126 "CRCW04022K20JNED" 0402 885,1870 r180 top
R127 "CRCW04023K30JNED" 0402 1310,1911.65 r0 top
R128 "CRCW04026K80JNED" 0402 885,1920 r180 top
R200 "CRCW040233R0JNED" 0402 175,1945 r180 top
R201 "CRCW04021K50JNED" 0402 220,1570 r180 top
R202 "CRCW040222R0JNED" 0402 250,1700 r270 top
R203 "CRCW040222R0JNED" 0402 100,1700 r270 top
R204 "CRCW040222R0JNED" 0402 340,1190 r90 top
R205 "CRCW040222R0JNED" 0402 390,1190 r90 top
R206 "CRCW040210K0JNED" 0402 225,1380 r180 top
R207 "CRCW040215K0FKED" 0402 420,1110 r180 top
R208 "CRCW040215K0FKED" 0402 310,1110 r0 top
R209 "CRCW040222R0JNED" 0402 560,1190 r90 top
R210 "CRCW040227R0JNED" 0402 435,1650 r180 top
R211 "CRCW040222R0JNED" 0402 610,1190 r90 top
R212 "CRCW040215K0FKED" 0402 640,1110 r180 top
R213 "CRCW040215K0FKED" 0402 530,1110 r0 top
R214 "CRCW040247K0JNED" 0402 205,1500 r180 top
R215 "CRCW040215K0FKED" 0402 696.38,1420 r180 top
R216 "CRCW040210K0JNED" 0402 620,1800 r180 top
R217 "CRCW040215K0FKED" 0402 696.38,1470 r180 top
R218 "CRCW040215K0FKED" 0402 696.38,1550 r180 top
R219 "CRCW040215K0FKED" 0402 696.38,1600 r180 top
R300 "CRCW0402470RJNED" 0402 1470,300 r180 top
R301 "CRCW0402390RJNED" 0402 1470,380 r180 top
R302 "CRCW040247K0JNED" 0402 565,225 r90 top
R303 "CRCW04021K40FKED" 0402 980,685 r0 top
R304 "CRCW0402100RJNED" 0402 515,565 r90 top
R305 "CRCW040227R0JNED" 0402 820,630 r0 top
R306 "CRCW040227R0JNED" 0402 820,685 r0 top
R307 "CRCW04021M00JNED" 0402 980,735 r0 top
R308 "CRCW040210K0JNED" 0402 1580,600 r270 top
R309 "CRCW04022K20JNED" 0402 1415,600 r270 top
R310 "CRCW04022K20JNED" 0402 1465,600 r90 top
R311 "CRCW0402100RJNED" 0402 1650,1065 r0 top
R312 "CRCW0402100RJNED" 0402 1650,1115 r180 top
R313 "CRCW0402100RJNED" 0402 1650,1015 r0 top
R314 "CRCW0402100RJNED" 0402 1650,955 r180 top
R315 "CRCW0402100RJNED" 0402 1650,893.35 r0 top
R316 "CRCW0402100RJNED" 0402 1650,843.35 r180 top
R317 "CRCW0402100RJNED" 0402 1650,733.35 r180 top
R318 "CRCW0402100RJNED" 0402 1650,783.35 r0 top
R319 "CRCW0402100RJNED" 0402 1650,678.35 r0 top
R320 "CRCW0402390RJNED" 0402 1470,460 r180 top
S300 "TL1015AF160QG" SW_TL1015AF160QG 400,280 r270 top
S301 "TL1015AF160QG" SW_TL1015AF160QG 400,610 r270 top
T101 "DMG1013UW" SOT-323 1885,1915 r0 top
T102 "BC850CLT1G" SOT-23 1520,2015 r270 top
TP1 "TESTPOINT" TP_VIA_060RND040 1600,1550 r0 top
TP2 "TESTPOINT" TP_VIA_060RND040 1700,1550 r0 top locked
TP3 "TESTPOINT" TP_VIA_060RND040 1600,1450 r0 top
TP4 "TESTPOINT" TP_VIA_060RND040 1700,1450 r0 top
TP5 "TESTPOINT" TP_VIA_060RND040 1600,1350 r0 top
TP6 "TESTPOINT" TP_VIA_060RND040 1700,1350 r0 top
TP7 "TESTPOINT" TP_VIA_060RND040 1600,1250 r0 top
TP8 "TESTPOINT" TP_VIA_060RND040 1700,1250 r0 top
U101 "MSP430F5528IRGCR" RGC0064B 1090,1235 r270 top
U102 "MSP430G2452IRSA16R" RSA0016B 1075,1955 r180 top
U103 "TS5A21366RSE" RSE0008A 1455,1685 r0 top
U200 "TPD2E001DRLR" DRL0005A 330,1945 r0 top
U201 "TUSB2046BIRHBR" RHB0032E 430,1480 r0 top
U202 "TPS73533DRB" DRB0008A 625,1925 r270 top
U300 "MSP430F5528IRGCT" RGC0064B 1145,430 r90 top
U302 "TPD4E002DRL2" DRL0005A 1550,1040 r90 top
U303 "TPD4E002DRL2" DRL0005A 1535,873.35 r0 top
U304 "TPD4E002DRL2" DRL0005A 1545.01,705 r90 top
ZZ2 "These assemblies are ESD sensitive, ESD precautions shall be observed." AssemblyNote -2195,3569.11 r0 top
ZZ3 "These assemblies must be clean and free from flux and all contaminants. Use of no clean flux is not acceptable." AssemblyNote -2195,3480.56 r0 top
ZZ4 "These assemblies must comply with workmanship standards IPC-A-610 Class 2, unless otherwise specified." AssemblyNote -2195,3392 r0 top

## Footprints (in the part's own frame and the unit in brackets; to place one, negate y for a bottom-side part, rotate by r counter-clockwise, add the part's x,y. Pads: shape width x height; smd on the part's side, far side on the other; paste and mask are expansions set on the pad)
0402 [mm] "0402 from SM-752 data"
  rect 0.8x0.6 smd: 1(-0.6,0) 2(0.6,0)
  silkscreen extent -1.22,-0.52 1.22,0.52, body extent -0.55,-0.3 0.55,0.3, height 0.6
0603 [mm] "0603 from SM-752 data"
  rect 1x0.95 smd: 1(-0.8,0) 2(0.8,0)
  silkscreen extent -1.52,-0.69 1.52,0.69, body extent -0.87,-0.47 0.87,0.47, height 0.85
0805_HV [mil] "0805 with 30mil clearance between pads"
  rect 50x63 smd: 1(-40,0) 2(40,0)
  silkscreen extent -74,-40 74,40, body extent -43,-29 43,29, height 43
3216-18 [mm] "Medium density IPC, based on Kemet T495 dimensions"
  rect 1.8x1.25 smd: 1(-1.3,0) 2(1.3,0)
  silkscreen extent -2.49,-0.54 -2.49,0.54, body extent -1.7,-0.9 1.7,0.9, height 1.8
AssemblyNote [mil] "Assembly Note"
Bumpon_SJ61A1 [mil] "3M Cylindrical Bumpon black"
  round 1 on Mech4: 0(0,0)
  silkscreen extent -156,-156 156,156, body extent -156,-155 156,156, height 201
CONN_USB_micro_ZX62R-B-5PA [mm] "Hirose"
  rect 0.4x1.35 smd: 1(1.3,0) 2(0.65,0) 3(0,0) 4(-0.65,0) 5(-1.3,0)
  rect 1.2x1.9 smd: 6(-0.875,-2.675) 7(0.875,-2.675)
  rect 1.6x1.9 smd: 8(-4,-2.675) 9(4,-2.675)
  rect 2.1x2.1 smd: 10(-3.1,-0.125) 11(3.1,-0.125)
  body extent -3.75,-5.33 3.75,0.18, height 2.55
"CSTCR CERAMIC RESONATOR - MURATA" [mm] "CSTCR-Resonator SMD footprint"
  rect 0.4x2.6 smd: 1(-1.5,0) 2(0,0) 3(1.5,0)
  silkscreen extent -2.49,-1.6 2.5,1.6, body extent -2.25,-1 2.25,1, height 1.1
DRB0008A [mm] "SON, 8-Leads, Body 3x3mm, Pitch 0.65mm, Thermal Pad 1.75x1.5mm, TI Recommended"
  oval 0.6x0.3 smd: 1(-1.4,0.975) 2(-1.4,0.325) 3(-1.4,-0.325) 4(-1.4,-0.975) 5(1.4,-0.975) 6(1.4,-0.325) 7(1.4,0.325) 8(1.4,0.975)
  rect 1.5x1.75 smd paste-0.75: 9(0,0)
  Top Layer region: -0.465,-1.5 -0.465,-0.875 -0.75,-0.875 -0.75,0.875 -0.465,0.875 -0.465,1.5 -0.185,1.5 -0.185,0.875 0.185,0.875 0.185,1.5 0.465,1.5 0.465,0.875 0.75,0.875 0.75,-0.875 0.465,-0.875 0.465,-1.5 0.185,-1.5 0.185,-0.875 -0.185,-0.875 -0.185,-1.5
  silkscreen extent -1.73,-1.73 1.73,1.73, body extent -1.57,-1.57 1.58,1.58, height 1.01
DRL0005A [mm] "SOTFL, 5-Flat Leads, Body 1.2x1.6x0.6mm, Pitch 0.5mm, TI recommended"
  rect 0.5x0.3 smd: 1(-0.75,0.5) 2(-0.75,0) 3(-0.75,-0.5) 4(0.75,-0.5) 5(0.75,0.5)
  silkscreen extent -0.9,-0.95 0.9,0.95, body extent -0.85,-0.85 0.85,0.85, height 0.62
Fiducial10-20 [mm]
  round 1 smd mask+0.5: 1(0,0)
  Top Layer keep-out circle w1.178: c0,0 r0.5
HDR2X10RA [mm] "Connector; M-Header; 10x2 Position; Right Angle"
  rect 1.5x1.5 hole 0.9: 1(0,0)
  round 1.5 hole 0.9: 2(0,2.54) 3(2.54,0) 4(2.54,2.54) 5(5.08,0) 6(5.08,2.54) 7(7.62,0) 8(7.62,2.54) 9(10.16,0) 10(10.16,2.54) 11(12.7,0) 12(12.7,2.54) 13(15.24,0) 14(15.24,2.54) 15(17.78,0) 16(17.78,2.54) 17(20.32,0) 18(20.32,2.54) 19(22.86,0) 20(22.86,2.54)
  body extent -3.81,-11.18 26.67,-1.52, height 7.49
LED_LTST-C190 [mm] "Lite-On"
  rect 0.8x0.8 smd: 1(-0.75,0) 2(0.75,0)
  silkscreen extent -1.1,-0.8 1.8,0.8, body extent -0.85,-0.45 0.85,0.45, height 0.9
LED_LTST-C190_Red [mm] "Lite-On"
  rect 0.8x0.8 smd: 1(-0.75,0) 2(0.75,0)
  silkscreen extent -1.1,-0.8 1.8,0.8, body extent -0.85,-0.45 0.85,0.45, height 0.9
Pb-Free_Overlay_Small [mil]
RGC0064B [mm]
  oval 0.6x0.24 smd mask+0.07: 1(-4.4,3.75) 2(-4.4,3.25) 3(-4.4,2.75) 4(-4.4,2.25) 5(-4.4,1.75) 6(-4.4,1.25) 7(-4.4,0.75) 8(-4.4,0.25) 9(-4.4,-0.25) 10(-4.4,-0.75) 11(-4.4,-1.25) 12(-4.4,-1.75) 13(-4.4,-2.25) 14(-4.4,-2.75) 15(-4.4,-3.25) 16(-4.4,-3.75) 33(4.4,-3.75) 34(4.4,-3.25) 35(4.4,-2.75) 36(4.4,-2.25) 37(4.4,-1.75) 38(4.4,-1.25) 39(4.4,-0.75) 40(4.4,-0.25) 41(4.4,0.25) 42(4.4,0.75) 43(4.4,1.25) 44(4.4,1.75) 45(4.4,2.25) 46(4.4,2.75) 47(4.4,3.25) 48(4.4,3.75)
  oval 0.24x0.6 smd mask+0.07: 17(-3.751,-4.4) 18(-3.251,-4.4) 19(-2.751,-4.4) 20(-2.251,-4.4) 21(-1.75,-4.4) 22(-1.25,-4.4) 23(-0.75,-4.4) 24(-0.25,-4.4) 25(0.25,-4.4) 26(0.75,-4.4) 27(1.25,-4.4) 28(1.75,-4.4) 29(2.251,-4.4) 30(2.751,-4.4) 31(3.251,-4.4) 32(3.751,-4.4) 49(3.751,4.4) 50(3.251,4.4) 51(2.751,4.4) 52(2.251,4.4) 53(1.75,4.4) 54(1.25,4.4) 55(0.75,4.4) 56(0.25,4.4) 57(-0.25,4.4) 58(-0.75,4.4) 59(-1.25,4.4) 60(-1.75,4.4) 61(-2.251,4.4) 62(-2.751,4.4) 63(-3.251,4.4) 64(-3.751,4.4)
  rect 4.25x4.25 smd paste-2.112: 65(0,0)
  silkscreen extent -5.1,-5.1 5.1,5.1, body extent -4.57,-4.57 4.57,4.57, height 1.01
RHB0032E [mm] "QFN, 32-Leads, Body 5x5mm, Pitch 0.5mm, Thermal Pad 3.45x3.45mm, TI Recommended"
  oval 0.6x0.24 smd: 1(-2.4,1.75) 2(-2.4,1.25) 3(-2.4,0.75) 4(-2.4,0.25) 5(-2.4,-0.25) 6(-2.4,-0.75) 7(-2.4,-1.25) 8(-2.4,-1.75) 17(2.4,-1.75) 18(2.4,-1.25) 19(2.4,-0.75) 20(2.4,-0.25) 21(2.4,0.25) 22(2.4,0.75) 23(2.4,1.25) 24(2.4,1.75)
  oval 0.24x0.6 smd: 9(-1.75,-2.4) 10(-1.25,-2.4) 11(-0.75,-2.4) 12(-0.25,-2.4) 13(0.25,-2.4) 14(0.75,-2.4) 15(1.25,-2.4) 16(1.75,-2.4) 25(1.75,2.4) 26(1.25,2.4) 27(0.75,2.4) 28(0.25,2.4) 29(-0.25,2.4) 30(-0.75,2.4) 31(-1.25,2.4) 32(-1.75,2.4)
  rect 3.45x3.45 smd paste-1.725: 33(0,0)
  silkscreen extent -2.72,-2.73 2.72,2.73, body extent -2.57,-2.57 2.58,2.58, height 1.01
RSA0016B [mm] "QFN, 16-Leads, Body 4x4mm, Pitch 0.65mm, Thermal Pad 2.7x2.7mm, TI Recommended"
  oval 0.6x0.3 smd: 1(-1.9,0.975) 2(-1.9,0.325) 3(-1.9,-0.325) 4(-1.9,-0.975) 9(1.9,-0.975) 10(1.9,-0.325) 11(1.9,0.325) 12(1.9,0.975)
  oval 0.3x0.6 smd: 5(-0.975,-1.9) 6(-0.325,-1.9) 7(0.325,-1.9) 8(0.975,-1.9) 13(0.975,1.9) 14(0.325,1.9) 15(-0.325,1.9) 16(-0.975,1.9)
  rect 2.7x2.7 smd paste-1.35: 17(0,0)
  silkscreen extent -2.2,-2.2 2.2,2.2, body extent -2.05,-2.05 2.05,2.05, height 1.01
RSE0008A [mm] "QFN, 8-Leads, Body 1.5x1.5mm, Pitch 0.5mm, TI Recommended"
  rect 0.55x0.25 smd: 1(-0.65,0.5) 3(-0.65,-0.5) 5(0.65,-0.5) 7(0.65,0.5)
  rect 0.55x0.2 smd: 2(-0.65,0) 6(0.65,0)
  rect 0.3x0.6 smd: 4(0,-0.65) 8(0,0.65)
  silkscreen extent -1.03,-0.92 0.77,0.93, body extent -0.77,-0.77 0.77,0.77, height 0.61
SOT-23 [mm] "SOT23, 3-Leads, Body 2.9x1.3mm, Pitch 0.95mm, Lead Span 2.5mm, IPC Medium Density"
  rrect50% 1x0.6 smd: 1(-1.2,0.95) 2(-1.2,-0.95) 3(1.2,0)
  silkscreen extent -1.62,-1.5 0.7,1.5, body extent -1.16,-1.45 1.21,1.45, height 1
SOT-323 [mm] "Zetex recommended land pattern.  March 2007"
  rect 0.8x0.6 smd: 1(-0.8,0.65) 2(-0.8,-0.65) 3(0.8,0)
  silkscreen extent -1.14,-1.22 0.78,1.22, body extent -1.13,-1.13 1.12,1.12, height 1.13
Sullins_GRPB071VWVN-RC [mm] "SULLINS"
  rect 1x1 hole 0.7: 1(-3.175,0)
  round 1 hole 0.7: 2(-1.905,0) 3(-0.635,0) 4(0.635,0) 5(1.905,0) 6(3.175,0) 7(4.445,0)
  silkscreen extent -4.25,-1.17 5.18,1.22
SW_TL1015AF160QG [mm] "E-Switch"
  rect 0.95x1.4 smd: 1(-2.1,0) 2(2.1,0)
  silkscreen extent -2,-1.5 2,1.5, body extent -2.3,-1.5 2.3,1.5, height 2
TI_Stacked_Overlay_Small [mil]
  silkscreen extent -418,-98 418,98
TI_Symbol_Overlay_Small [mil]
  silkscreen extent -90,-88 91,88
TP_VIA_060RND040 [mil] "TP_VIA_060RND040"
  round 60 hole 40: 1(0,0)

## Part data
C101 C310: "CAP, CERM, 0.47uF, 10V, +/-10%, X5R, 0402"
C102 C107 C308 C309: "CAP, CERM, 0.22uF, 10V, +/-10%, X5R, 0402"
C103 C113 C118 C120 C121 C125: "CAP, CERM, 0.1uF, 10V, +/-10%, X5R, 0402"
C104 C117 C119 C306: "CAP, CERM, 4.7 µF, 10 V, +/- 10%, X5R, 0603"
C106 C109: "CAP, TA, 4.7 µF, 10 V, +/- 10%, 5 ohm, SMD"
C110 C111 C204 C205 C206 C207 C303 C304: "CAP, CERM, 10pF, 50V, +/-5%, C0G/NP0, 0402"
C112 C300: "CAP, CERM, 1000pF, 50V, +/-10%, X7R, 0402"
C115 C116 C122 C123: "CAP, CERM, 33pF, 50V, +/-5%, C0G/NP0, 0402"
C124: "CAP, CERM, 0.1 µF, 10 V, +/- 10%, X5R, 0402"
C200 C201: "CAP, CERM, 22pF, 50V, +/-5%, C0G/NP0, 0402"
C208 C209 C210 C305 C307: "CAP, CERM, 0.1uF, 16V, +/-10%, X5R, 0402"
C211: "CAP, CERM, 0.01uF, 16V, +/-10%, X5R, 0402"
C212: "CAP, CERM, 1uF, 10V, +/-10%, X5R, 0603"
C213: "CAP, CERM, 2.2uF, 10V, +/-10%, X5R, 0603"
D102 D103: "Diode, Schottky, 40V, 0.2A, SOT-23"
D300 LED101: "LED, Red, SMD"
D301 D302 LED102: "LED, Green, SMD"
FID1 FID2 FID3: "Fiducial mark.  There is nothing to buy or mount."
GND TP1 TP2 TP3 TP4 TP5 TP6 TP7 TP8: "TEST POINT.  No entry in BOM."
H1 H2 H3 H4: "Bumpon, Cylindrical, 0.312 X 0.200, Black"
J200: "Connector, micro USB Type B, Reverse, Receptacle, SMD"
J300: "Header, 50mil, 7x1, Gold,  TH"
J301: "Header, Male, 10-Pin, 2 row, Shround, Right Angle"
L101: "Inductor, Shielded, Composite, 2.2uH, 0.95A, 0.16 ohm, SMD"
Logo1 Logo3: library part TI_Logo, "Texas Instrument Corporate Signature"
Logo2: library part Pb-Free
Q101: "4.00MHz resonator"
Q200: library part MURATA-FILTER_CSTCR6M00G15, "6.00MHz resonator"
Q300: library part MURATA-FILTER_CSTCR4M00G15, "4.00MHz resonator"
R101 R300: "RES, 470 ohm, 5%, 0.063W, 0402"
R102 R301 R320: "RES, 390 ohm, 5%, 0.063W, 0402"
R103 R104 R210 R305 R306: "RES, 27 ohm, 5%, 0.063W, 0402"
R105: "RES, 1.40 k, 1%, 0.063 W, 0402"
R106 R307: "RES, 1.0Meg ohm, 5%, 0.063W, 0402"
R107 R108: "RES, 47 k, 5%, 0.063 W, 0402"
R109 R214 R302: "RES, 47k ohm, 5%, 0.063W, 0402"
R112 R113 R114 R115: "RES, 220 k, 5%, 0.063 W, 0402"
R116 R117: "RES, 4.7 k, 5%, 0.063 W, 0402"
R118: "RES, 820, 5%, 0.063 W, 0402"
R119: "RES, 0, 5%, 0.063 W, 0402"
R120: "RES, 470, 5%, 0.063 W, 0402"
R121 R122: "RES, 220k ohm, 5%, 0.063W, 0402"
R124: "RES, 240k ohm, 5%, 0.063W, 0402"
R125: "RES, 150k ohm, 1%, 0.063W, 0402"
R126 R309 R310: "RES, 2.2 k, 5%, 0.063 W, 0402"
R127: "RES, 3.3 k, 5%, 0.063 W, 0402"
R128: "RES, 6.8 k, 5%, 0.063 W, 0402"
R200: "RES, 33 ohm, 5%, 0.063W, 0402"
R201: "RES, 1.5k ohm, 5%, 0.063W, 0402"
R202 R203 R204 R205 R209 R211: "RES, 22 ohm, 5%, 0.063W, 0402"
R206 R308: "RES, 10 k, 5%, 0.063 W, 0402"
R207 R208 R212 R213 R215 R217 R218 R219: "RES, 15.0k ohm, 1%, 0.063W, 0402"
R216: "RES, 10k ohm, 5%, 0.063W, 0402"
R303: "RES, 1.40k ohm, 1%, 0.063W, 0402"
R304: "RES, 100 ohm, 5%, 0.063W, 0402"
R311 R312 R313 R314 R315 R316 R317 R318 R319: "RES, 100, 5%, 0.063 W, 0402"
S300 S301: "Switch, Tactile, SPST-NO, 0.05A, 12V, SMT"
T101: library part BSS84W-7-F, "MOSFET, P-CH, -50V, -0.13A, SOT-323"
T102: library part "BC850CLT1G, ON Semiconductor", "Transistor, NPN, 45V, 0.1A, SOT-23"
U101 U300: "25 MHz Mixed Signal Microcontroller with 128 KB Flash, 8192 B SRAM and 47 GPIOs, -40 to 85 degC, 64-pin QFN (RGC), Green (RoHS & no Sb/Br)"
U102: "16 MHz Mixed Signal Microcontroller with 8 KB Flash, 256 B SRAM and 16 GPIOs, 16-pin QFN (RSA), Green (RoHS & no Sb/Br)"
U103: "0.75-O DUAL SPST ANALOG SWITCH WITH 1.8-V COMPATIBLE INPUT LOGIC, RSE0008A"
U200: "Low-Capacitance + / - 15 kV ESD-Protection Array for High-Speed Data Interfaces, 2 Channels, -40 to +85 degC, 5-pin SOT (DRL), Green (RoHS & no Sb/Br)"
U201: "4-Port Full-Speed USB Hub, 3.3V, -40 to 85 degC, 32-Pin QFN (RHB), Green (RoHS & no Sb/Br)"
U202: "500mA, Low Quiescent Current, Ultra-Low Noise, High PSRR Low-Dropout Linear Regulator, DRB0008A"
U302 U303 U304: "Low-Capacitance Array with + / - 15 kV ESD Protection, 4 Channels, -40 to +85 degC, 5-pin SOT (DRL), Green (RoHS & no Sb/Br)"
ZZ2 ZZ3 ZZ4: library part AssemblyNote

## Free pads (board coordinates)
  round 100 hole 70: 0(2050,425) 0(2050,1775)

## Via types
v1: diameter 30, hole 16, Top Layer to Bottom Layer, tented both sides, 107 vias
v2: diameter 19.68, hole 7.87, Top Layer to Bottom Layer, 40 vias

## Nets (pads, with @x,y where several pads share a name; then routed paths per layer and width w, separated by ;. In a path a pad name is that pad's centre, name@x,y a point inside that pad or via, vN(x,y) a via of type N, cw(c..) or ccw(c..) an arc to the next point about the centre after c; other vN are vias at no path point)
BRIDGE_DM: C304.1 R305.2 U300.52 | length 203.6
  Top Layer w8: R305.2@843.62,630 C304.1@843.62,580 880,580 941.4,518.6 U300.52@971.77,518.61
BRIDGE_DP: C303.1 R303.1 R306.2 U300.50 | length 298.2
  Top Layer w8: R306.2@843.62,685 898.62,685 C303.1@900,686.38 ; R303.1@956.38,685 955,686.38 C303.1@900,686.38 ; U300.50@971.77,557.99 927.02,557.98 900,585 C303.1@900,686.38
BRIDGE_PUR: R303.2 R304.1 R307.2 U300.51 | length 826.1
  Top Layer w8: R304.1@515,541.38 723.62,541.38 v1(725,540) ; U300.51@971.77,538.3 998.29,538.29 v1(1025,565) ; R307.2@1003.62,735 R303.2@1003.62,685 v1(1060,685)
  Bottom Layer w8: v1(725,540) 1000,540 v1(1025,565) 1060,600 v1(1060,685)
BRIDGE_RST: C300.1 J300.1 R302.1 S300.2 U300.64 | length 995.8
  Top Layer w8: S300.2@400,197.32 510.95,197.32 C300.1@515,201.38 521.38,195 v1(770,195) ; U300.64@971.77,282.32 1037.32,282.32 v1(1055,300)
  Signal Layer 2 w8: v1(770,195) 950,195 v1(1055,300)
  Bottom Layer w8: J300.1@1025,110 J300.1@1025,125 1025,180 1055,210 v1(1055,300)
BRIDGE_RXD: R315.1 U300.38 U303.5 | length 587.6
  Top Layer w8: U300.38@1194.21,603.23 1194.21,624.21 1320,750 1406.25,750 1486.25,830 1525,830 1535,840 1535,880 1548.03,893.03 U303.5@1564.53,893.03 ; U303.5@1564.84,893.35 R315.1@1626.38,893.35
BRIDGE_SCL: R310.2 R317.2 U300.35 U304.4 | length 529.8
  Top Layer w8: U300.35@1253.27,603.23 1253.27,628.27 1330,705 1465,705 ; R310.2@1465,623.62 1465,705 ; R317.2@1626.38,733.35 1625.2,734.53 U304.4@1564.69,734.53 1564.69,724.69 1545.01,705 1465,705
BRIDGE_SDA: R309.1 R318.1 U300.34 U304.5 | length 509.2
  Top Layer w8: U300.34@1272.95,603.23 1272.95,622.95 1325,675 v1(1415,675) R309.1@1415,623.62 ; v1(1475,735) 1524.85,735 U304.5@1525.32,734.53 1525.32,765.01 1543.66,783.35 R318.1@1626.38,783.35
  Bottom Layer w8: v1(1415,675) v1(1475,735)
BRIDGE_TCK: J300.2 U300.63 | length 291.4
  Top Layer w8: U300.63@971.77,302.01 997.01,302.01 v1(1020,325)
  Bottom Layer w8: J300.2@975,110 J300.2@975,125 975,170 1020,215 v1(1020,325)
BRIDGE_TDI: J300.4 U300.61 | length 274.3
  Top Layer w8: J300.4@875,125 875,165 905,195 905,305 941.39,341.39 U300.61@971.77,341.39
BRIDGE_TDO: J300.5 U300.60 | length 320.7
  Top Layer w8: J300.5@825,125 825,155 885,215 885,315 931.08,361.08 U300.60@971.77,361.09
BRIDGE_TEST: J300.6 U300.59 | length 367.2
  Top Layer w8: J300.6@775,125 775,150 865,240 865,325 920.77,380.77 U300.59@971.77,380.78
BRIDGE_TMS: J300.3 U300.62 | length 227.8
  Top Layer w8: J300.3@925,125 925,295 951.7,321.7 U300.62@971.77,321.7
BRIDGE_TXD: R316.2 U300.37 U303.4 | length 544.2
  Top Layer w8: U300.37@1213.9,603.23 1213.9,618.9 1325,730 1415,730 1495,810 1545,810 1565,830 1565,853.19 U303.4@1564.53,853.66 1586.34,853.66 1596.65,843.35 R316.2@1626.38,843.35
BRIDGE_V18: C309.1 U300.55 | length 136.6
  Top Layer w9: C309.1@843.62,480 885,480 905.47,459.53 U300.55@971.77,459.53
BRIDGE_VCORE: C310.1 U300.17 | length 105.3
  Top Layer w8: U300.17@1318.23,282.32 1357.68,282.32 1375,265 C310.1@1375,223.62
BRIDGE_VUSB: C308.1 U300.54 | length 149.2
  Top Layer w8: C308.1@843.62,530 880,530 930.78,479.22 U300.54@971.77,479.22
DM3: R215.2 U201.19 | length 160.9
  Top Layer w8: U201.19@524.49,1450.47 610,1450.47 640.47,1420 R215.2@672.76,1420
DM4: R218.2 U201.23 | length 156.9
  Top Layer w8: U201.23@524.49,1529.21 546.76,1529.21 567.55,1550 R218.2@672.76,1550
DP3: R217.2 U201.20 | length 148.3
  Top Layer w8: U201.20@524.49,1470.16 672.6,1470.16 R217.2@672.76,1470
DP4: R219.2 U201.24 | length 169.4
  Top Layer w8: U201.24@524.49,1548.9 538.9,1548.9 590,1600 R219.2@672.76,1600
EZFET_AVBUS: C123.1 R124.1 R125.2 U101.1 | length 240.7
  Top Layer w8: U101.1@1237.64,1408.23 1237.64,1422.64 1255,1440 1285,1440 1308.62,1463.62 R125.2@1308.62,1480 C123.1@1308.62,1530 1310,1531.38 R124.1@1380,1531.38
EZFET_AVCC: C116.1 R114.1 R115.2 U102.6 | length 347.1
  Top Layer w8: U102.6@1087.8,2029.8 1087.8,2052.8 1128.62,2093.62 R114.1@1295,2093.62 R115.2@1345,2093.62 C116.1@1395,2093.62
EZFET_AVCCOUT: C115.1 R112.1 R113.2 U102.1 | length 259.3
  Top Layer w8: U102.1@1149.8,1916.61 1173.39,1916.61 1228.35,1861.65 R112.1@1286.38,1861.65 C115.1@1286.38,1811.65 R113.2@1286.38,1761.65
EZFET_AVCCOUT2ADC: C122.1 R121.1 R122.2 U101.2 | length 610.7
  Top Layer w8: R121.1@908.62,1810 R122.2@908.62,1760 C122.1@908.62,1710 908.62,1676.38 965,1620 1100,1620 1220,1500 1220,1455 1217.95,1452.95 U101.2@1217.95,1408.23
EZFET_DCDCCAL0: R126.1 U102.12 | length 110.9
  Top Layer w8: R126.1@908.62,1870 940,1870 986.61,1916.61 U102.12@1000.2,1916.61
EZFET_DCDCCAL1: R127.1 U102.2 | length 149.2
  Top Layer w8: U102.2@1149.8,1942.2 1182.8,1942.2 1213.35,1911.65 R127.1@1286.38,1911.65
EZFET_DCDCCAL2: R128.1 U102.11 | length 100.8
  Top Layer w8: R128.1@908.62,1920 940,1920 962.2,1942.2 U102.11@1000.2,1942.2
EZFET_DCDCIO0: U101.5 U102.4 | length 676.5
  Top Layer w8: U102.4@1149.8,1993.39 1163.39,1993.39 v1(1190,2020) ; U101.5@1158.9,1408.23 1158.9,1430 1188.9,1460 v1(1190,1460)
  Bottom Layer w8: v1(1190,1460) v1(1190,2020)
EZFET_DCDCIO1: U101.6 U102.5 | length 725.7
  Top Layer w8: U102.5@1113.39,2029.8 1113.39,2043.39 1135,2065 v1(1145,2065) ; U101.6@1139.21,1408.23 1139.21,1474.21 v1(1160,1495)
  Bottom Layer w8: v1(1145,2065) 1145,1613.01 1146.87,1611.13 1146.87,1608.13 1160,1595 v1(1160,1495)
EZFET_DCDCPULSE: R118.2 U101.28 U102.3 | length 1384.5
  Top Layer w8: v1(800,1205) 838.92,1166.08 U101.28@916.77,1166.09 ; v1(800,1615) v1(800,1720) ; U102.3@1149.8,1967.8 1182.8,1967.8 1190.59,1960 v1(1230,1960) R118.2@1286.38,1960
  Signal Layer 2 w8: v1(800,1205) v1(800,1615) ; v1(800,1720) 800,1785 885,1870 1190,1870 1230,1910 v1(1230,1960)
EZFET_DCDCRST: U101.7 U102.9 | length 893.3
  Top Layer w8: v1(880,1985) 888.39,1993.39 U102.9@1000.2,1993.39 ; U101.7@1119.53,1408.23 1120,1408.7 1120,1490 1130,1500 v1(1130,1535)
  Bottom Layer w8: v1(880,1985) 880,1954.51 895,1939.51 895,1625 960,1560 1105,1560 v1(1130,1535)
EZFET_DCDCTEST: U101.8 U102.10 | length 760
  Top Layer w8: v1(930,1965) 932.8,1967.8 U102.10@1000.2,1967.8 ; v1(1065,1590) 1100,1555 U101.8@1099.84,1408.23
  Bottom Layer w8: v1(930,1965) 930,1620 960,1590 v1(1065,1590)
EZFET_DM: C111.1 R103.2 U101.52 | length 325.5
  Top Layer w8: U101.52@1263.23,1146.4 1328.6,1146.4 1405,1070 1405,970.41 R103.2@1406.79,968.62 C111.1@1456.79,968.62
EZFET_DP: C110.1 R104.2 R105.2 R106.1 U101.50 | length 337.6
  Top Layer w8: R105.2@1205,968.62 C110.1@1255,968.62 R106.1@1306.79,968.62 R104.2@1356.79,968.62 1355,970.41 1355,1030 1277.99,1107.01 U101.50@1263.23,1107.02
EZFET_HOSTSCL: R117.1 U101.35 U102.7 | length 1582.6
  Top Layer w8: v1(865,990) 940,990 981.73,1031.73 U101.35@981.73,1061.77 ; R117.1@913.62,2075 1045,2075 1062.2,2057.8 U102.7@1062.2,2029.8
  Bottom Layer w8: v1(865,990) 830,1025 830,2011.65 893.35,2075 v1(1002.5,2075)
EZFET_HOSTSDA: R116.1 U101.34 U102.8 | length 1350.7
  Top Layer w8: R116.1@913.62,2025 918.43,2029.8 U102.8@1036.61,2029.8 ; v1(920,1020) 940,1020 962.05,1042.05 U101.34@962.05,1061.77
  Bottom Layer w8: v1(920,1020) 880,1020 850,1050 850,2000 880,2030 v1(960,2030)
EZFET_LED1: R101.2 U101.20 | length 67.9
  Top Layer w8: R101.2@853.62,1335 885,1335 896.4,1323.6 U101.20@916.77,1323.6
EZFET_LED2: R102.2 U101.21 | length 73.1
  Top Layer w8: R102.2@853.62,1280 875,1280 898.92,1303.92 U101.21@916.77,1303.91
EZFET_PUR: R105.1 U101.51 | length 425.4
  Top Layer w8: R105.1@1203.62,920 R105.1@1205,921.38 v1(1205,870) ; U101.51@1263.23,1126.7 1303.3,1126.7 v1(1345,1085)
  Bottom Layer w8: v1(1205,870) 1290,955 1290,995 1345,1050 v1(1345,1085)
EZFET_RST: C112.1 R109.1 TP1.1 U101.64 | length 406.1
  Top Layer w8: U101.64@1263.23,1382.68 1285.65,1382.67 1414.35,1511.38 1551.38,1511.38 1590,1550 TP1.1@1600,1550
EZFET_RXD: R311.1 U101.38 U302.4 | length 670.7
  Top Layer w8: U101.38@1040.79,1061.77 1040.79,1090.79 v1(1070,1120) ; v1(1570,1105) 1570,1069.84 U302.4@1569.69,1069.53 1621.85,1069.53 R311.1@1626.38,1065
  Signal Layer 2 w8: v1(1070,1120) 1555,1120 v1(1570,1105)
EZFET_SBWTCK_TST: R313.1 U101.44 U302.3 | length 547.5
  Top Layer w8: U101.44@1158.9,1061.77 1158.9,1046.1 v1(1185,1020) v1@1180,1020 ; v1(1475,1055) 1490,1040 1565,1040 1567.78,1037.22 U302.3@1567.78,1010.47 ; U302.3@1569.69,1010.47 1574.21,1015 R313.1@1626.38,1015
  Signal Layer 2 w8: v1(1185,1020) 1400,1020 1435,1055 v1(1475,1055)
EZFET_SBWTDIO_RST: R314.2 U101.43 U302.1 | length 648.3
  Top Layer w8: U101.43@1139.21,1061.77 1139.21,1005.79 v1(1155,990) ; v1(1455,1020) 1520.79,1020 U302.1@1530.31,1010.47 1530.31,944.69 1544.26,930.74 1570.74,930.74 1586.91,946.91 1595,955 R314.2@1626.38,955
  Signal Layer 2 w8: v1(1155,990) 1155.78,989.22 1399.22,989.22 1430,1020 v1(1455,1020)
EZFET_TCK: TP2.1 U101.63 | length 514.2
  Top Layer w9: U101.63@1263.23,1362.98 1293.32,1362.99 1405,1474.66 1554.66,1474.66 1580,1500 1650,1500 TP2.1@1700,1550
EZFET_TDI: TP4.1 U101.61 | length 585.6
  Top Layer w8: v1(1215,1325) 1216.4,1323.6 U101.61@1263.23,1323.6
  Bottom Layer w8: v1(1215,1325) 1265,1375 1535,1375 1560,1400 1650,1400 TP4.1@1700,1450
EZFET_TDO: TP5.1 U101.60 | length 354.3
  Top Layer w8: U101.60@1263.23,1303.91 v1@1303.92,1303.92
  Bottom Layer w8: v1(1305,1305) 1350,1350 TP5.1@1600,1350
EZFET_TEST: TP6.1 U101.59 | length 577
  Top Layer w8: v1(1215,1285) 1215.78,1284.22 U101.59@1263.23,1284.23
  Bottom Layer w8: v1(1215,1285) 1235,1265 1311.25,1265 1346.25,1300 1575,1300 1650,1300 TP6.1@1700,1350
EZFET_TMS: TP3.1 U101.62 | length 381
  Top Layer w8: U101.62@1263.23,1343.3 1303.29,1343.29 1410,1450 TP3.1@1600,1450
EZFET_TXD: R312.2 U101.37 U302.5 | length 757.7
  Top Layer w8: v1(1020,1110) 1021.1,1108.9 U101.37@1021.1,1061.77 ; v1(1435,1085) 1505,1085 1520.47,1069.53 U302.5@1530.31,1069.53 1530.31,1115.31 1551.65,1136.65 1604.72,1136.65 R312.2@1626.38,1115
  Signal Layer 2 w8: v1(1020,1110) 1050,1080 1311.99,1080 1333.87,1058.13 1408.13,1058.13 v1(1435,1085)
EZFET_V18: C102.1 U101.55 | length 146.6
  Top Layer w8: U101.55@1263.23,1205.47 1344.53,1205.47 1365,1185 C102.1@1401.38,1185
EZFET_VCCEN1: R107.2 U101.26 U103.3 | length 1039.8
  Top Layer w8: U101.26@916.77,1205.47 940.46,1205.46 v1(955,1220) ; v1(1290,1625) 1308.62,1606.38 R107.2@1308.62,1580 ; v1(1395,1640) 1420.32,1665.32 U103.3@1429.41,1665.32
  Bottom Layer w8: v1(955,1220) 955,1370 1005,1420 1320,1420 1395,1495 v1(1395,1640) 1380,1625 v1(1290,1625)
EZFET_VCCEN2: R108.2 U101.27 U103.7 | length 1457.5
  Top Layer w8: U101.27@916.77,1185.77 979.23,1185.77 v1(980,1185) ; U103.7@1480.59,1704.69 1504.69,1704.69 1515,1715 1630,1715 1638.62,1706.38 R108.2@1638.62,1685 v1(1685,1685)
  Bottom Layer w8: v1(980,1185) 980,1205 990,1215 990,1370 1015,1395 1340,1395 1425,1480 1425,1684.49 1424.49,1685 1454.49,1715 1561.38,1715 1591.38,1685 v1(1685,1685)
EZFET_VCCOUT: C119.1 C120.1 L101.2 R112.2 R121.2 R126.2 R127.2 R128.2 U103.8 | length 1815.9
  Top Layer w8: R121.2@861.38,1810 861.38,1840 ; R128.2@861.38,1920 861.38,1840 ; v1(980,1840) 861.38,1840
  Top Layer w10: R127.2@1333.62,1911.65 R112.2@1333.62,1861.65 1335.28,1860 v1(1400,1860) ; U103.8@1455,1710.59 v1(1455,1755)
  Top Layer w12: C120.1@2038.62,2090 2051.5,2077.12 C119.1@2051.5,2035 2051.5,1968.5 L101.2@2060,1960
  Top Layer w15: v1(2060,1890) L101.2@2060,1960
  Signal Layer 2 w8: v1(980,1840) 1335,1840 1355,1860 v1(1400,1860)
  Signal Layer 2 w15: v1(1400,1860) 1400,1810 v1(1455,1755) 1640,1755 1665,1780 1900,1780 2010,1890 v1(2060,1890)
EZFET_VCORE: C101.1 U101.17 | length 94.5
  Top Layer w8: C101.1@870,1446.38 870,1410 897.33,1382.67 U101.17@916.77,1382.68
EZFET_VREF: C121.1 U101.9 | length 72.6
  Top Layer w8: C121.1@1070,1476.38 1070,1445 1080.16,1434.84 U101.9@1080.16,1408.23 U101.9@1080,1408.39
EZFET_VUSB: C107.1 U101.54 | length 149.2
  Top Layer w8: U101.54@1263.23,1185.77 1324.23,1185.77 1375,1135 C107.1@1391.38,1135
EZFET_XT2IN: Q101.1 U101.57 | length 187.6
  Top Layer w9: U101.57@1263.23,1244.85 1329.84,1244.84 1355.94,1270.94 Q101.1@1440,1270.94
EZFET_XT2OUT: Q101.3 U101.58 | length 256.8
  Top Layer w8: U101.58@1263.23,1264.53 1310,1264.53 1345,1299.53 1345,1348.11 1385.94,1389.06 Q101.3@1440,1389.06